# EAGLE board Console_Block-GiantPanel-v10 (EAGLE 6.6.0), part 1 of 13
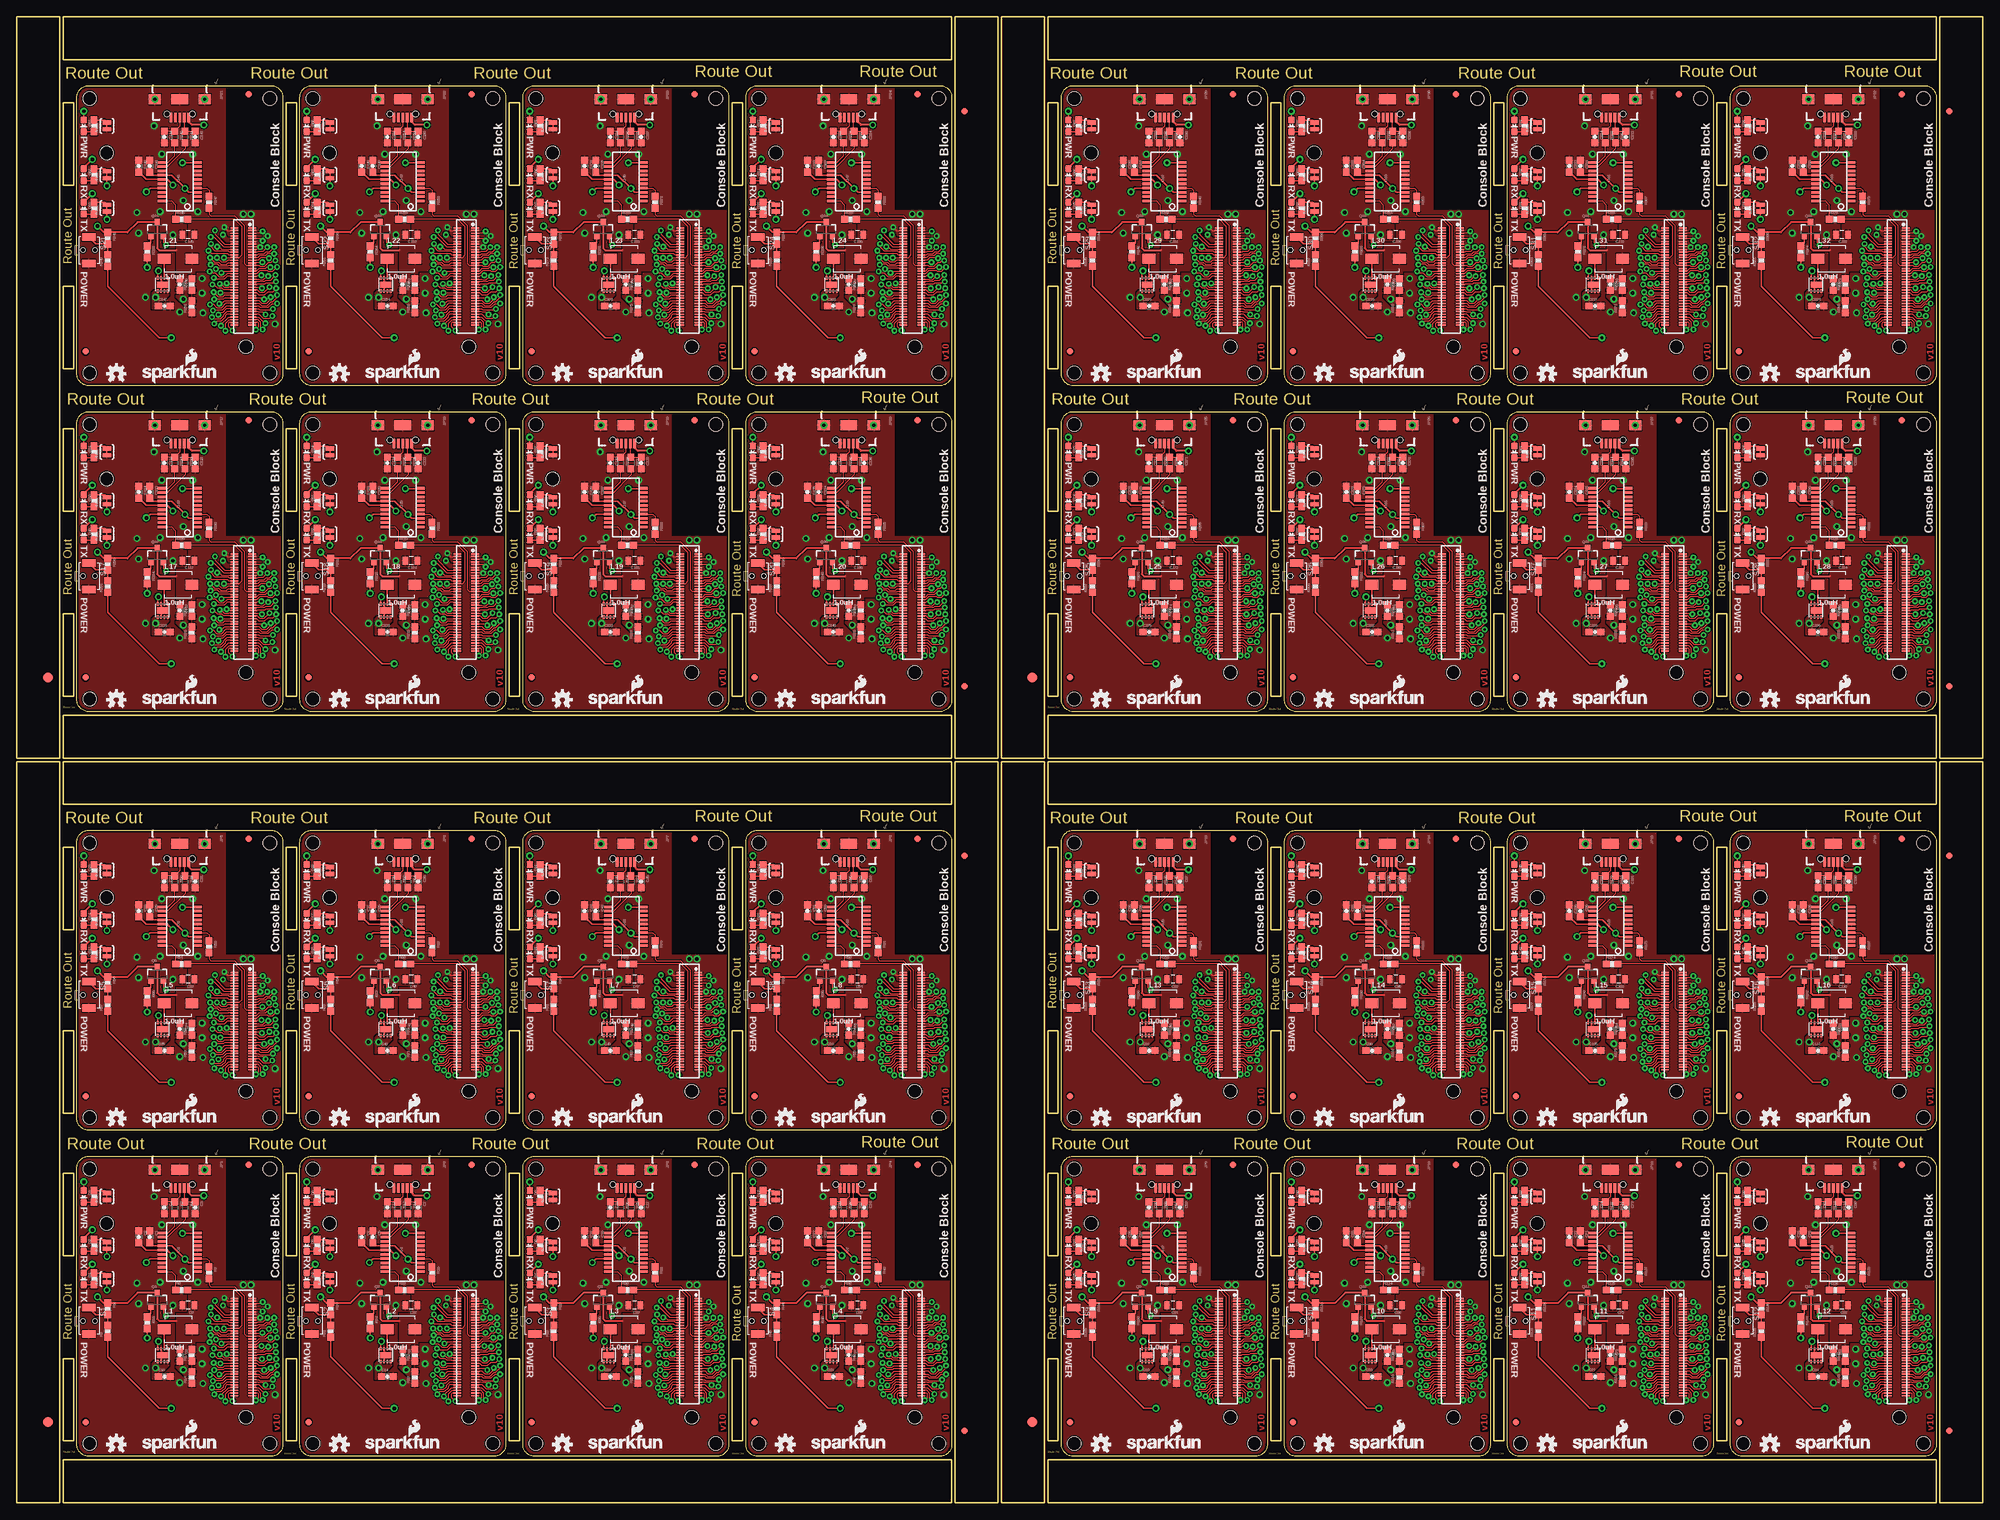
[diagram p0: board, top side]
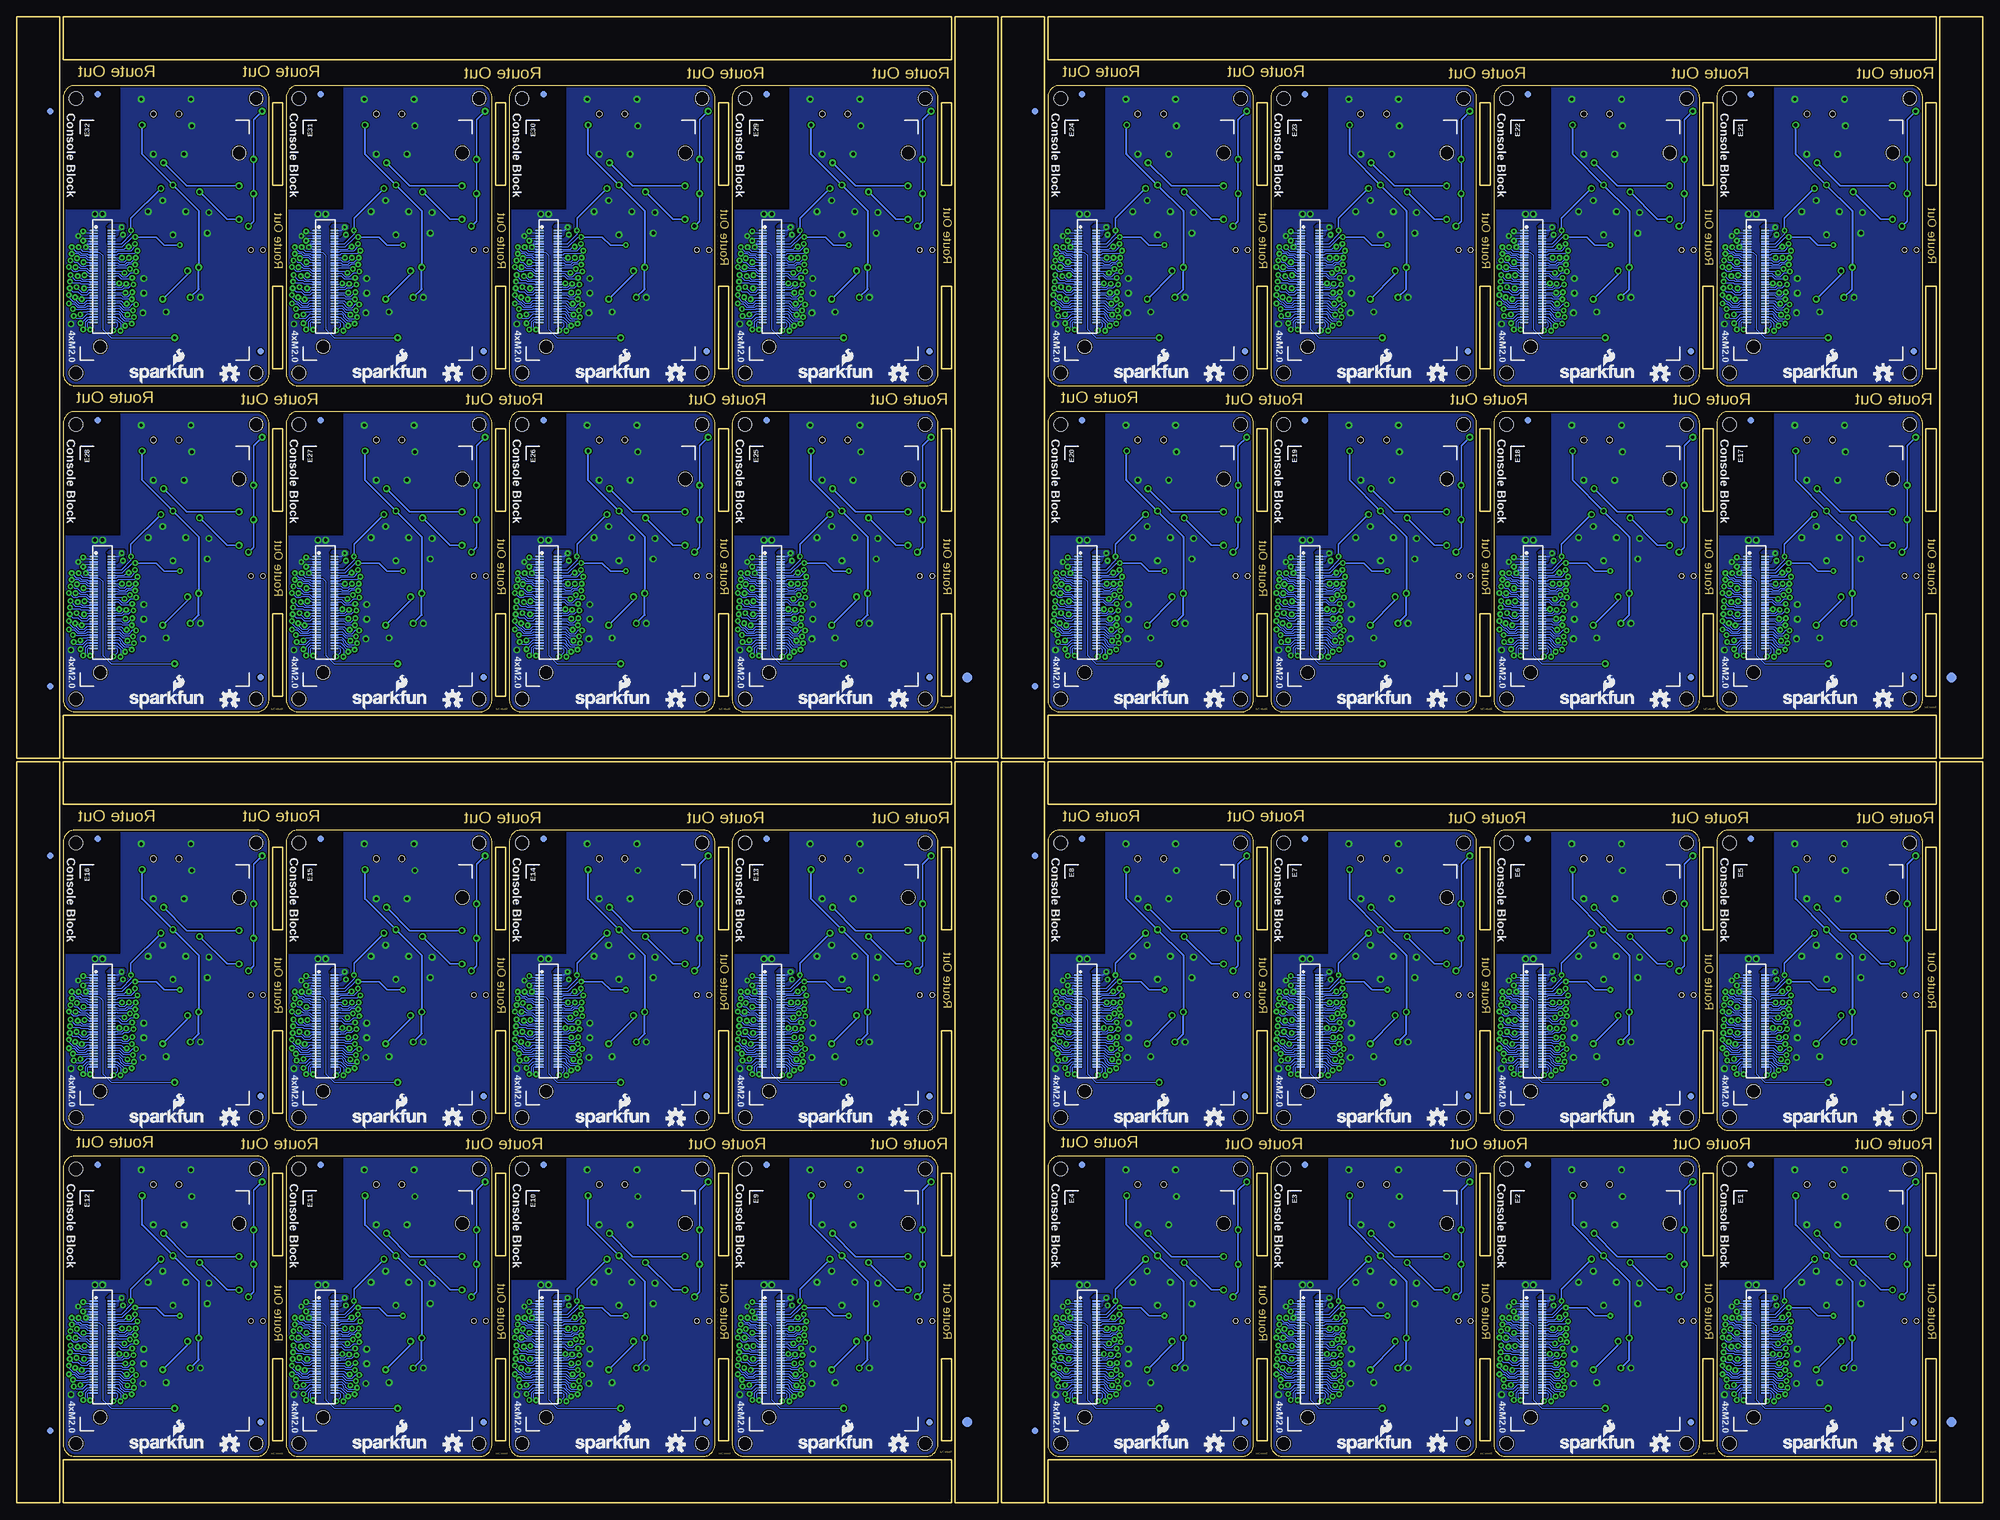
[diagram p1: board, bottom side, seen from below]

Size 291.08 x 219.96 mm. Coordinates in mm from the lower left corner, seen from the top.
Outline: 592 segments
Copper layers (1*16): Top 0.035mm / dielectric 1.5mm / Bottom 0.035mm
Design rules "SparkFun-2-layer *": minimum track width 6mil, minimum drill 13mil, track to track 6mil, track to pad 6mil, pad to pad 6mil, via to via 6mil, smd to smd 6mil, copper to edge 8mil, drill to drill 8mil, minimum pad ring 12mil, minimum via ring 10mil, stop-mask expansion 4mil, vias tented up to drill 20mil, thermal gap 6mil
Holes 2 mm at 37.47,8.76 10.79,8.76 10.79,49.4 37.47,49.4 70.48,8.76 43.81,8.76 43.81,49.4 70.48,49.4 103.5,8.76 76.83,8.76 76.83,49.4 103.5,49.4 136.53,8.76 109.86,8.76 109.86,49.4 136.53,49.4 37.47,57.02 10.79,57.02 10.79,97.66 37.47,97.66 70.48,57.02 43.81,57.02 43.81,97.66 70.48,97.66 103.5,57.02 76.83,57.02 76.83,97.66 103.5,97.66 136.53,57.02 109.86,57.02 109.86,97.66 136.53,97.66 183.26,8.76 156.59,8.76 156.59,49.4 183.26,49.4 216.28,8.76 189.61,8.76 189.61,49.4 216.28,49.4 249.3,8.76 222.63,8.76 222.63,49.4 249.3,49.4 282.32,8.76 255.65,8.76 255.65,49.4 282.32,49.4 183.26,57.02 156.59,57.02 156.59,97.66 183.26,97.66 216.28,57.02 189.61,57.02 189.61,97.66 216.28,97.66 249.3,57.02 222.63,57.02 222.63,97.66 249.3,97.66 282.32,57.02 255.65,57.02 255.65,97.66 282.32,97.66 37.47,119 10.79,119 10.79,159.64 37.47,159.64 70.48,119 43.81,119 43.81,159.64 70.48,159.64 103.5,119 76.83,119 76.83,159.64 103.5,159.64 136.53,119 109.86,119 109.86,159.64 136.53,159.64 37.47,167.26 10.79,167.26 10.79,207.9 37.47,207.9 70.48,167.26 43.81,167.26 43.81,207.9 70.48,207.9 103.5,167.26 76.83,167.26 76.83,207.9 103.5,207.9 136.53,167.26 109.86,167.26 109.86,207.9 136.53,207.9 183.26,119 156.59,119 156.59,159.64 183.26,159.64 216.28,119 189.61,119 189.61,159.64 216.28,159.64 249.3,119 222.63,119 222.63,159.64 249.3,159.64 282.32,119 255.65,119 255.65,159.64 282.32,159.64 183.26,167.26 156.59,167.26 156.59,207.9 183.26,207.9 216.28,167.26 189.61,167.26 189.61,207.9 216.28,207.9 249.3,167.26 222.63,167.26 222.63,207.9 249.3,207.9 282.32,167.26 255.65,167.26 255.65,207.9 282.32,207.9
tRestrict: area 31,33 to 39.4,51.3; area 64,33 to 72.4,51.3; area 97,33 to 105.4,51.3; area 130,33 to 138.4,51.3; area 31,81.3 to 39.4,99.6; area 64,81.3 to 72.4,99.6; area 97,81.3 to 105.4,99.6; area 130,81.3 to 138.4,99.6; area 176.8,33 to 185.2,51.3; area 209.8,33 to 218.2,51.3; area 242.8,33 to 251.2,51.3; area 275.8,33 to 284.2,51.3; 20 more areas; 128 lines
bRestrict: area 31,33 to 39.4,51.3; area 64,33 to 72.4,51.3; area 97,33 to 105.4,51.3; area 130,33 to 138.4,51.3; area 31,81.3 to 39.4,99.6; area 64,81.3 to 72.4,99.6; area 97,81.3 to 105.4,99.6; area 130,81.3 to 138.4,99.6; area 176.8,33 to 185.2,51.3; area 209.8,33 to 218.2,51.3; area 242.8,33 to 251.2,51.3; area 275.8,33 to 284.2,51.3; 20 more areas; 64 lines

## Footprints (pad centres in the part's own frame; a part is rotated, then mirrored left to right if it is on the bottom)
0603-CAP = smd 1.1 x 1: 1 -0.85,0; 2 0.85,0
0805 = smd 0.8 x 1.2: 1 -0.9,0; 2 0.9,0
LED-0603 = smd 1 x 1: A 0,-0.877; C 0,0.877
EDISON_DAUGHTER = smd 1.14 x 0.2: 1 1.98,19.17; 2 4.62,19.17; 3 1.98,18.77; 4 4.62,18.77; 5 1.98,18.37; 6 4.62,18.37; 7 1.98,17.97; 8 4.62,17.97; 9 1.98,17.57; 10 4.62,17.57; 11 1.98,17.17; 12 4.62,17.17; 13 1.98,16.77; 14 4.62,16.77; 15 1.98,16.37; 16 4.62,16.37; 17 1.98,15.97; 18 4.62,15.97; 19 1.98,15.57; 20 4.62,15.57; 21 1.98,15.17; 22 4.62,15.17; 23 1.98,14.77; 24 4.62,14.77; 25 1.98,14.37; 26 4.62,14.37; 27 1.98,13.97; 28 4.62,13.97; 29 1.98,13.57; 30 4.62,13.57; 31 1.98,13.17; 32 4.62,13.17; 33 1.98,12.77; 34 4.62,12.77; 35 1.98,12.37; 36 4.62,12.37; 37 1.98,11.97; 38 4.62,11.97; 39 1.98,11.57; 40 4.62,11.57; 41 1.98,11.17; 42 4.62,11.17; 43 1.98,10.77; 44 4.62,10.77; 45 1.98,10.37; 46 4.62,10.37; 47 1.98,9.97; 48 4.62,9.97; 49 1.98,9.57; 50 4.62,9.57; 51 1.98,9.17; 52 4.62,9.17; 53 1.98,8.77; 54 4.62,8.77; 55 1.98,8.37; 56 4.62,8.37; 57 1.98,7.97; 58 4.62,7.97; 59 1.98,7.57; 60 4.62,7.57; 61 1.98,7.17; 62 4.62,7.17; 63 1.98,6.77; 64 4.62,6.77; 65 1.98,6.37; 66 4.62,6.37; 67 1.98,5.97; 68 4.62,5.97; 69 1.98,5.57; 70 4.62,5.57 | hole 2: 23.53,30.67; 2.93,1.98
FIDUCIAL-1.5X3 = smd 1.5 x 1.5: 1 0,0
FIDUCIAL-1X2 = smd 1 x 1: 1 0,0
USB-B-MICRO-SMD_V03 = smd 1.4 x 0.4: D+1 2.7,0; D-1 2.7,0.65; GND1 2.7,-1.3; ID1 2.7,-0.65; VBUS1 2.7,1.3 | smd 1.5 x 1.8: SHIELD1 0,3.7; SHIELD2 0,-3.7 | smd 1.5 x 2.5: SHIELD3 0,0 | hole 0.85: 2.2,1.9; 2.2,-1.9
INDUCTOR-SRP4020 = smd 1.9 x 1.5: P$1 -2.05,0; P$2 2.05,0
SOT23-3 = smd 0.8 x 0.9: 1 -0.95,-1; 2 0.95,-1; 3 0,1.1
0603 = smd 1.1 x 1: 1 -0.85,0; 2 0.85,0
0603-RES = smd 1.1 x 1: 1 -0.85,0; 2 0.85,0
TACTILE_SWITCH-SMD-RIGHT-ANGLE = smd 1.1 x 2: 1 -1.95,0; 2 1.95,0 | hole 0.7: 0,0.9; 0,-0.9
PAD-JUMPER-2-NC_BY_TRACE_YES_SILK = smd 0.635 x 1.27: 1 -0.508,0; 2 0.508,0
SSOP20_L = smd 0.381 x 1.143: 1 -2.857,-2.68; 2 -2.223,-2.68; 3 -1.587,-2.68; 4 -0.953,-2.68; 5 -0.318,-2.68; 6 0.318,-2.68; 7 0.953,-2.68; 8 1.587,-2.68; 9 2.223,-2.68; 10 2.857,-2.68; 11 2.857,2.68; 12 2.223,2.68; 13 1.587,2.68; 14 0.953,2.68; 15 0.318,2.68; 16 -0.318,2.68; 17 -0.953,2.68; 18 -1.587,2.68; 19 -2.223,2.68; 20 -2.857,2.68
WSON-8-PAD = smd 0.25 x 0.5: 1 -0.75,-0.95; 2 -0.25,-0.95; 3 0.25,-0.95; 4 0.75,-0.95; 5 0.75,0.95; 6 0.25,0.95; 7 -0.25,0.95; 8 -0.75,0.95 | smd 1.6 x 0.9: PAD 0,0
DF40C-70DP-0.4(51) = smd 0.2 x 1.14 bottom: 1 6.8,1.32; 2 6.8,-1.32; 3 6.4,1.32; 4 6.4,-1.32; 5 6,1.32; 6 6,-1.32; 7 5.6,1.32; 8 5.6,-1.32; 9 5.2,1.32; 10 5.2,-1.32; 11 4.8,1.32; 12 4.8,-1.32; 13 4.4,1.32; 14 4.4,-1.32; 15 4,1.32; 16 4,-1.32; 17 3.6,1.32; 18 3.6,-1.32; 19 3.2,1.32; 20 3.2,-1.32; 21 2.8,1.32; 22 2.8,-1.32; 23 2.4,1.32; 24 2.4,-1.32; 25 2,1.32; 26 2,-1.32; 27 1.6,1.32; 28 1.6,-1.32; 29 1.2,1.32; 30 1.2,-1.32; 31 0.8,1.32; 32 0.8,-1.32; 33 0.4,1.32; 34 0.4,-1.32; 35 0,1.32; 36 0,-1.32; 37 -0.4,1.32; 38 -0.4,-1.32; 39 -0.8,1.32; 40 -0.8,-1.32; 41 -1.2,1.32; 42 -1.2,-1.32; 43 -1.6,1.32; 44 -1.6,-1.32; 45 -2,1.32; 46 -2,-1.32; 47 -2.4,1.32; 48 -2.4,-1.32; 49 -2.8,1.32; 50 -2.8,-1.32; 51 -3.2,1.32; 52 -3.2,-1.32; 53 -3.6,1.32; 54 -3.6,-1.32; 55 -4,1.32; 56 -4,-1.32; 57 -4.4,1.32; 58 -4.4,-1.32; 59 -4.8,1.32; 60 -4.8,-1.32; 61 -5.2,1.32; 62 -5.2,-1.32; 63 -5.6,1.32; 64 -5.6,-1.32; 65 -6,1.32; 66 -6,-1.32; 67 -6.4,1.32; 68 -6.4,-1.32; 69 -6.8,1.32; 70 -6.8,-1.32; NC1 7.2,1.32; NC2 7.2,-1.32; NC3 -7.2,-1.32; NC4 -7.2,1.32

## Placement (x,y rotation side)
C1  0.1uF  [0603-CAP]  19.68,39.37 270 top
C2  0.1uF  [0603-CAP]  18.03,39.37 270 top
C3  47pF  [0603-CAP]  26.42,43.69 270 top
C4  47pF  [0603-CAP]  21.84,43.69 270 top
C5  0.1uF  [0603-CAP]  52.7,39.37 270 top
C6  0.1uF  [0603-CAP]  51.05,39.37 270 top
C7  47pF  [0603-CAP]  59.44,43.69 270 top
C8  22uF  [0805]  25.4,29.21 180 top
C9  47pF  [0603-CAP]  24.13,21.84 270 top
C10  4.7uF  [0603-CAP]  21.84,18.67 0 top
C11  47pF  [0603-CAP]  54.86,43.69 270 top
C12  22uF  [0805]  58.42,29.21 180 top
C13  47pF  [0603-CAP]  57.15,21.84 270 top
C14  4.7uF  [0603-CAP]  54.86,18.67 0 top
C15  0.1uF  [0603-CAP]  85.72,39.37 270 top
C16  0.1uF  [0603-CAP]  84.07,39.37 270 top
C17  47pF  [0603-CAP]  92.46,43.69 270 top
C18  47pF  [0603-CAP]  87.88,43.69 270 top
C19  22uF  [0805]  91.44,29.21 180 top
C20  47pF  [0603-CAP]  90.17,21.84 270 top
C21  4.7uF  [0603-CAP]  87.88,18.67 0 top
C22  0.1uF  [0603-CAP]  118.75,39.37 270 top
C23  0.1uF  [0603-CAP]  117.09,39.37 270 top
C24  47pF  [0603-CAP]  125.48,43.69 270 top
C25  47pF  [0603-CAP]  120.9,43.69 270 top
C26  22uF  [0805]  124.46,29.21 180 top
C27  47pF  [0603-CAP]  123.19,21.84 270 top
C28  4.7uF  [0603-CAP]  120.9,18.67 0 top
C29  0.1uF  [0603-CAP]  19.68,87.63 270 top
C30  0.1uF  [0603-CAP]  18.03,87.63 270 top
C31  47pF  [0603-CAP]  26.42,91.95 270 top
C32  47pF  [0603-CAP]  21.84,91.95 270 top
C33  22uF  [0805]  25.4,77.47 180 top
C34  47pF  [0603-CAP]  24.13,70.1 270 top
C35  4.7uF  [0603-CAP]  21.84,66.93 0 top
C36  0.1uF  [0603-CAP]  52.7,87.63 270 top
C37  0.1uF  [0603-CAP]  51.05,87.63 270 top
C38  47pF  [0603-CAP]  59.44,91.95 270 top
C39  47pF  [0603-CAP]  54.86,91.95 270 top
C40  22uF  [0805]  58.42,77.47 180 top
C41  47pF  [0603-CAP]  57.15,70.1 270 top
C42  4.7uF  [0603-CAP]  54.86,66.93 0 top
C43  0.1uF  [0603-CAP]  85.72,87.63 270 top
C44  0.1uF  [0603-CAP]  84.07,87.63 270 top
C45  47pF  [0603-CAP]  92.46,91.95 270 top
C46  47pF  [0603-CAP]  87.88,91.95 270 top
C47  22uF  [0805]  91.44,77.47 180 top
C48  47pF  [0603-CAP]  90.17,70.1 270 top
C49  4.7uF  [0603-CAP]  87.88,66.93 0 top
C50  0.1uF  [0603-CAP]  118.75,87.63 270 top
C51  0.1uF  [0603-CAP]  117.09,87.63 270 top
C52  47pF  [0603-CAP]  125.48,91.95 270 top
C53  47pF  [0603-CAP]  120.9,91.95 270 top
C54  22uF  [0805]  124.46,77.47 180 top
C55  47pF  [0603-CAP]  123.19,70.1 270 top
C56  4.7uF  [0603-CAP]  120.9,66.93 0 top
C57  0.1uF  [0603-CAP]  165.48,39.37 270 top
C58  0.1uF  [0603-CAP]  163.83,39.37 270 top
C59  47pF  [0603-CAP]  172.21,43.69 270 top
C60  47pF  [0603-CAP]  167.64,43.69 270 top
C61  22uF  [0805]  171.2,29.21 180 top
C62  47pF  [0603-CAP]  169.93,21.84 270 top
C63  4.7uF  [0603-CAP]  167.64,18.67 0 top
C64  0.1uF  [0603-CAP]  198.5,39.37 270 top
C65  0.1uF  [0603-CAP]  196.85,39.37 270 top
C66  47pF  [0603-CAP]  205.23,43.69 270 top
C67  47pF  [0603-CAP]  200.66,43.69 270 top
C68  22uF  [0805]  204.22,29.21 180 top
C69  47pF  [0603-CAP]  202.95,21.84 270 top
C70  4.7uF  [0603-CAP]  200.66,18.67 0 top
C71  0.1uF  [0603-CAP]  231.52,39.37 270 top
C72  0.1uF  [0603-CAP]  229.87,39.37 270 top
C73  47pF  [0603-CAP]  238.25,43.69 270 top
C74  47pF  [0603-CAP]  233.68,43.69 270 top
C75  22uF  [0805]  237.24,29.21 180 top
C76  47pF  [0603-CAP]  235.97,21.84 270 top
C77  4.7uF  [0603-CAP]  233.68,18.67 0 top
C78  0.1uF  [0603-CAP]  264.54,39.37 270 top
C79  0.1uF  [0603-CAP]  262.89,39.37 270 top
C80  47pF  [0603-CAP]  271.27,43.69 270 top
C81  47pF  [0603-CAP]  266.7,43.69 270 top
C82  22uF  [0805]  270.26,29.21 180 top
C83  47pF  [0603-CAP]  268.99,21.84 270 top
C84  4.7uF  [0603-CAP]  266.7,18.67 0 top
C85  0.1uF  [0603-CAP]  165.48,87.63 270 top
C86  0.1uF  [0603-CAP]  163.83,87.63 270 top
C87  47pF  [0603-CAP]  172.21,91.95 270 top
C88  47pF  [0603-CAP]  167.64,91.95 270 top
C89  22uF  [0805]  171.2,77.47 180 top
C90  47pF  [0603-CAP]  169.93,70.1 270 top
C91  4.7uF  [0603-CAP]  167.64,66.93 0 top
C92  0.1uF  [0603-CAP]  198.5,87.63 270 top
C93  0.1uF  [0603-CAP]  196.85,87.63 270 top
C94  47pF  [0603-CAP]  205.23,91.95 270 top
C95  47pF  [0603-CAP]  200.66,91.95 270 top
C96  22uF  [0805]  204.22,77.47 180 top
C97  47pF  [0603-CAP]  202.95,70.1 270 top
C98  4.7uF  [0603-CAP]  200.66,66.93 0 top
C99  0.1uF  [0603-CAP]  231.52,87.63 270 top
C100  0.1uF  [0603-CAP]  229.87,87.63 270 top
C101  47pF  [0603-CAP]  238.25,91.95 270 top
C102  47pF  [0603-CAP]  233.68,91.95 270 top
C103  22uF  [0805]  237.24,77.47 180 top
C104  47pF  [0603-CAP]  235.97,70.1 270 top
C105  4.7uF  [0603-CAP]  233.68,66.93 0 top
C106  0.1uF  [0603-CAP]  264.54,87.63 270 top
C107  0.1uF  [0603-CAP]  262.89,87.63 270 top
C108  47pF  [0603-CAP]  271.27,91.95 270 top
C109  47pF  [0603-CAP]  266.7,91.95 270 top
C110  22uF  [0805]  270.26,77.47 180 top
C111  47pF  [0603-CAP]  268.99,70.1 270 top
C112  4.7uF  [0603-CAP]  266.7,66.93 0 top
C113  0.1uF  [0603-CAP]  19.68,149.61 270 top
C114  0.1uF  [0603-CAP]  18.03,149.61 270 top
C115  47pF  [0603-CAP]  26.42,153.92 270 top
C116  47pF  [0603-CAP]  21.84,153.92 270 top
C117  22uF  [0805]  25.4,139.45 180 top
C118  47pF  [0603-CAP]  24.13,132.08 270 top
C119  4.7uF  [0603-CAP]  21.84,128.91 0 top
C120  0.1uF  [0603-CAP]  52.7,149.61 270 top
C121  0.1uF  [0603-CAP]  51.05,149.61 270 top
C122  47pF  [0603-CAP]  59.44,153.92 270 top
C123  47pF  [0603-CAP]  54.86,153.92 270 top
C124  22uF  [0805]  58.42,139.45 180 top
C125  47pF  [0603-CAP]  57.15,132.08 270 top
C126  4.7uF  [0603-CAP]  54.86,128.91 0 top
C127  0.1uF  [0603-CAP]  85.72,149.61 270 top
C128  0.1uF  [0603-CAP]  84.07,149.61 270 top
C129  47pF  [0603-CAP]  92.46,153.92 270 top
C130  47pF  [0603-CAP]  87.88,153.92 270 top
C131  22uF  [0805]  91.44,139.45 180 top
C132  47pF  [0603-CAP]  90.17,132.08 270 top
C133  4.7uF  [0603-CAP]  87.88,128.91 0 top
C134  0.1uF  [0603-CAP]  118.75,149.61 270 top
C135  0.1uF  [0603-CAP]  117.09,149.61 270 top
C136  47pF  [0603-CAP]  125.48,153.92 270 top
C137  47pF  [0603-CAP]  120.9,153.92 270 top
C138  22uF  [0805]  124.46,139.45 180 top
C139  47pF  [0603-CAP]  123.19,132.08 270 top
C140  4.7uF  [0603-CAP]  120.9,128.91 0 top
C141  0.1uF  [0603-CAP]  19.68,197.87 270 top
C142  0.1uF  [0603-CAP]  18.03,197.87 270 top
C143  47pF  [0603-CAP]  26.42,202.18 270 top
C144  47pF  [0603-CAP]  21.84,202.18 270 top
C145  22uF  [0805]  25.4,187.71 180 top
C146  47pF  [0603-CAP]  24.13,180.34 270 top
C147  4.7uF  [0603-CAP]  21.84,177.16 0 top
C148  0.1uF  [0603-CAP]  52.7,197.87 270 top
C149  0.1uF  [0603-CAP]  51.05,197.87 270 top
C150  47pF  [0603-CAP]  59.44,202.18 270 top
C151  47pF  [0603-CAP]  54.86,202.18 270 top
C152  22uF  [0805]  58.42,187.71 180 top
C153  47pF  [0603-CAP]  57.15,180.34 270 top
C154  4.7uF  [0603-CAP]  54.86,177.16 0 top
C155  0.1uF  [0603-CAP]  85.72,197.87 270 top
C156  0.1uF  [0603-CAP]  84.07,197.87 270 top
C157  47pF  [0603-CAP]  92.46,202.18 270 top
C158  47pF  [0603-CAP]  87.88,202.18 270 top
C159  22uF  [0805]  91.44,187.71 180 top
C160  47pF  [0603-CAP]  90.17,180.34 270 top
C161  4.7uF  [0603-CAP]  87.88,177.16 0 top
C162  0.1uF  [0603-CAP]  118.75,197.87 270 top
C163  0.1uF  [0603-CAP]  117.09,197.87 270 top
C164  47pF  [0603-CAP]  125.48,202.18 270 top
C165  47pF  [0603-CAP]  120.9,202.18 270 top
C166  22uF  [0805]  124.46,187.71 180 top
C167  47pF  [0603-CAP]  123.19,180.34 270 top
C168  4.7uF  [0603-CAP]  120.9,177.16 0 top
C169  0.1uF  [0603-CAP]  165.48,149.61 270 top
C170  0.1uF  [0603-CAP]  163.83,149.61 270 top
C171  47pF  [0603-CAP]  172.21,153.92 270 top
C172  47pF  [0603-CAP]  167.64,153.92 270 top
C173  22uF  [0805]  171.2,139.45 180 top
C174  47pF  [0603-CAP]  169.93,132.08 270 top
C175  4.7uF  [0603-CAP]  167.64,128.91 0 top
C176  0.1uF  [0603-CAP]  198.5,149.61 270 top
C177  0.1uF  [0603-CAP]  196.85,149.61 270 top
C178  47pF  [0603-CAP]  205.23,153.92 270 top
C179  47pF  [0603-CAP]  200.66,153.92 270 top
C180  22uF  [0805]  204.22,139.45 180 top
C181  47pF  [0603-CAP]  202.95,132.08 270 top
C182  4.7uF  [0603-CAP]  200.66,128.91 0 top
C183  0.1uF  [0603-CAP]  231.52,149.61 270 top
C184  0.1uF  [0603-CAP]  229.87,149.61 270 top
C185  47pF  [0603-CAP]  238.25,153.92 270 top
C186  47pF  [0603-CAP]  233.68,153.92 270 top
C187  22uF  [0805]  237.24,139.45 180 top
C188  47pF  [0603-CAP]  235.97,132.08 270 top
C189  4.7uF  [0603-CAP]  233.68,128.91 0 top
C190  0.1uF  [0603-CAP]  264.54,149.61 270 top
C191  0.1uF  [0603-CAP]  262.89,149.61 270 top
C192  47pF  [0603-CAP]  271.27,153.92 270 top
C193  47pF  [0603-CAP]  266.7,153.92 270 top
C194  22uF  [0805]  270.26,139.45 180 top
C195  47pF  [0603-CAP]  268.99,132.08 270 top
C196  4.7uF  [0603-CAP]  266.7,128.91 0 top
C197  0.1uF  [0603-CAP]  165.48,197.87 270 top
C198  0.1uF  [0603-CAP]  163.83,197.87 270 top
C199  47pF  [0603-CAP]  172.21,202.18 270 top
C200  47pF  [0603-CAP]  167.64,202.18 270 top
C201  22uF  [0805]  171.2,187.71 180 top
C202  47pF  [0603-CAP]  169.93,180.34 270 top
C203  4.7uF  [0603-CAP]  167.64,177.16 0 top
C204  0.1uF  [0603-CAP]  198.5,197.87 270 top
C205  0.1uF  [0603-CAP]  196.85,197.87 270 top
C206  47pF  [0603-CAP]  205.23,202.18 270 top
C207  47pF  [0603-CAP]  200.66,202.18 270 top
C208  22uF  [0805]  204.22,187.71 180 top
C209  47pF  [0603-CAP]  202.95,180.34 270 top
C210  4.7uF  [0603-CAP]  200.66,177.16 0 top
C211  0.1uF  [0603-CAP]  231.52,197.87 270 top
C212  0.1uF  [0603-CAP]  229.87,197.87 270 top
C213  47pF  [0603-CAP]  238.25,202.18 270 top
C214  47pF  [0603-CAP]  233.68,202.18 270 top
C215  22uF  [0805]  237.24,187.71 180 top
C216  47pF  [0603-CAP]  235.97,180.34 270 top
C217  4.7uF  [0603-CAP]  233.68,177.16 0 top
C218  0.1uF  [0603-CAP]  264.54,197.87 270 top
C219  0.1uF  [0603-CAP]  262.89,197.87 270 top
C220  47pF  [0603-CAP]  271.27,202.18 270 top
C221  47pF  [0603-CAP]  266.7,202.18 270 top
C222  22uF  [0805]  270.26,187.71 180 top
C223  47pF  [0603-CAP]  268.99,180.34 270 top
C224  4.7uF  [0603-CAP]  266.7,177.16 0 top
D1  RED  [LED-0603]  9.91,33.15 180 top
D2  YELLOW  [LED-0603]  9.91,38.1 180 top
D3  BLUE  [LED-0603]  9.91,45.34 180 top
D4  RED  [LED-0603]  42.93,33.15 180 top
D5  YELLOW  [LED-0603]  42.93,38.1 180 top
D6  BLUE  [LED-0603]  42.93,45.34 180 top
D7  RED  [LED-0603]  75.95,33.15 180 top
D8  YELLOW  [LED-0603]  75.95,38.1 180 top
D9  BLUE  [LED-0603]  75.95,45.34 180 top
D10  RED  [LED-0603]  108.97,33.15 180 top
D11  YELLOW  [LED-0603]  108.97,38.1 180 top
D12  BLUE  [LED-0603]  108.97,45.34 180 top
D13  RED  [LED-0603]  9.91,81.41 180 top
D14  YELLOW  [LED-0603]  9.91,86.36 180 top
D15  BLUE  [LED-0603]  9.91,93.6 180 top
D16  RED  [LED-0603]  42.93,81.41 180 top
D17  YELLOW  [LED-0603]  42.93,86.36 180 top
D18  BLUE  [LED-0603]  42.93,93.6 180 top
D19  RED  [LED-0603]  75.95,81.41 180 top
D20  YELLOW  [LED-0603]  75.95,86.36 180 top
D21  BLUE  [LED-0603]  75.95,93.6 180 top
D22  RED  [LED-0603]  108.97,81.41 180 top
D23  YELLOW  [LED-0603]  108.97,86.36 180 top
D24  BLUE  [LED-0603]  108.97,93.6 180 top
D25  RED  [LED-0603]  155.7,33.15 180 top
D26  YELLOW  [LED-0603]  155.7,38.1 180 top
D27  BLUE  [LED-0603]  155.7,45.34 180 top
D28  RED  [LED-0603]  188.72,33.15 180 top
D29  YELLOW  [LED-0603]  188.72,38.1 180 top
D30  BLUE  [LED-0603]  188.72,45.34 180 top
D31  RED  [LED-0603]  221.74,33.15 180 top
D32  YELLOW  [LED-0603]  221.74,38.1 180 top
D33  BLUE  [LED-0603]  221.74,45.34 180 top
D34  RED  [LED-0603]  254.76,33.15 180 top
D35  YELLOW  [LED-0603]  254.76,38.1 180 top
D36  BLUE  [LED-0603]  254.76,45.34 180 top
D37  RED  [LED-0603]  155.7,81.41 180 top
D38  YELLOW  [LED-0603]  155.7,86.36 180 top
D39  BLUE  [LED-0603]  155.7,93.6 180 top
D40  RED  [LED-0603]  188.72,81.41 180 top
D41  YELLOW  [LED-0603]  188.72,86.36 180 top
D42  BLUE  [LED-0603]  188.72,93.6 180 top
D43  RED  [LED-0603]  221.74,81.41 180 top
D44  YELLOW  [LED-0603]  221.74,86.36 180 top
D45  BLUE  [LED-0603]  221.74,93.6 180 top
D46  RED  [LED-0603]  254.76,81.41 180 top
D47  YELLOW  [LED-0603]  254.76,86.36 180 top
D48  BLUE  [LED-0603]  254.76,93.6 180 top
D49  RED  [LED-0603]  9.91,143.38 180 top
D50  YELLOW  [LED-0603]  9.91,148.34 180 top
D51  BLUE  [LED-0603]  9.91,155.57 180 top
D52  RED  [LED-0603]  42.93,143.38 180 top
D53  YELLOW  [LED-0603]  42.93,148.34 180 top
D54  BLUE  [LED-0603]  42.93,155.57 180 top
D55  RED  [LED-0603]  75.95,143.38 180 top
D56  YELLOW  [LED-0603]  75.95,148.34 180 top
D57  BLUE  [LED-0603]  75.95,155.57 180 top
D58  RED  [LED-0603]  108.97,143.38 180 top
D59  YELLOW  [LED-0603]  108.97,148.34 180 top
D60  BLUE  [LED-0603]  108.97,155.57 180 top
D61  RED  [LED-0603]  9.91,191.64 180 top
D62  YELLOW  [LED-0603]  9.91,196.6 180 top
D63  BLUE  [LED-0603]  9.91,203.84 180 top
D64  RED  [LED-0603]  42.93,191.64 180 top
D65  YELLOW  [LED-0603]  42.93,196.6 180 top
D66  BLUE  [LED-0603]  42.93,203.84 180 top
D67  RED  [LED-0603]  75.95,191.64 180 top
D68  YELLOW  [LED-0603]  75.95,196.6 180 top
D69  BLUE  [LED-0603]  75.95,203.84 180 top
D70  RED  [LED-0603]  108.97,191.64 180 top
D71  YELLOW  [LED-0603]  108.97,196.6 180 top
D72  BLUE  [LED-0603]  108.97,203.84 180 top
D73  RED  [LED-0603]  155.7,143.38 180 top
D74  YELLOW  [LED-0603]  155.7,148.34 180 top
D75  BLUE  [LED-0603]  155.7,155.57 180 top
D76  RED  [LED-0603]  188.72,143.38 180 top
D77  YELLOW  [LED-0603]  188.72,148.34 180 top
D78  BLUE  [LED-0603]  188.72,155.57 180 top
D79  RED  [LED-0603]  221.74,143.38 180 top
D80  YELLOW  [LED-0603]  221.74,148.34 180 top
D81  BLUE  [LED-0603]  221.74,155.57 180 top
D82  RED  [LED-0603]  254.76,143.38 180 top
D83  YELLOW  [LED-0603]  254.76,148.34 180 top
D84  BLUE  [LED-0603]  254.76,155.57 180 top
D85  RED  [LED-0603]  155.7,191.64 180 top
D86  YELLOW  [LED-0603]  155.7,196.6 180 top
D87  BLUE  [LED-0603]  155.7,203.84 180 top
D88  RED  [LED-0603]  188.72,191.64 180 top
D89  YELLOW  [LED-0603]  188.72,196.6 180 top
D90  BLUE  [LED-0603]  188.72,203.84 180 top
D91  RED  [LED-0603]  221.74,191.64 180 top
D92  YELLOW  [LED-0603]  221.74,196.6 180 top
D93  BLUE  [LED-0603]  221.74,203.84 180 top
D94  RED  [LED-0603]  254.76,191.64 180 top
D95  YELLOW  [LED-0603]  254.76,196.6 180 top
D96  BLUE  [LED-0603]  254.76,203.84 180 top
E1  EDISON_CONNECTOR_FULLMOUNTING_HOLES  [EDISON_DAUGHTER]  36.83,10.67 0 bottom
E2  EDISON_CONNECTOR_FULLMOUNTING_HOLES  [EDISON_DAUGHTER]  69.85,10.67 0 bottom
E3  EDISON_CONNECTOR_FULLMOUNTING_HOLES  [EDISON_DAUGHTER]  102.87,10.67 0 bottom
E4  EDISON_CONNECTOR_FULLMOUNTING_HOLES  [EDISON_DAUGHTER]  135.89,10.67 0 bottom
E5  EDISON_CONNECTOR_FULLMOUNTING_HOLES  [EDISON_DAUGHTER]  36.83,58.93 0 bottom
E6  EDISON_CONNECTOR_FULLMOUNTING_HOLES  [EDISON_DAUGHTER]  69.85,58.93 0 bottom
E7  EDISON_CONNECTOR_FULLMOUNTING_HOLES  [EDISON_DAUGHTER]  102.87,58.93 0 bottom
E8  EDISON_CONNECTOR_FULLMOUNTING_HOLES  [EDISON_DAUGHTER]  135.89,58.93 0 bottom
E9  EDISON_CONNECTOR_FULLMOUNTING_HOLES  [EDISON_DAUGHTER]  182.63,10.67 0 bottom
E10  EDISON_CONNECTOR_FULLMOUNTING_HOLES  [EDISON_DAUGHTER]  215.65,10.67 0 bottom
E11  EDISON_CONNECTOR_FULLMOUNTING_HOLES  [EDISON_DAUGHTER]  248.67,10.67 0 bottom
E12  EDISON_CONNECTOR_FULLMOUNTING_HOLES  [EDISON_DAUGHTER]  281.69,10.67 0 bottom
E13  EDISON_CONNECTOR_FULLMOUNTING_HOLES  [EDISON_DAUGHTER]  182.63,58.93 0 bottom
E14  EDISON_CONNECTOR_FULLMOUNTING_HOLES  [EDISON_DAUGHTER]  215.65,58.93 0 bottom
E15  EDISON_CONNECTOR_FULLMOUNTING_HOLES  [EDISON_DAUGHTER]  248.67,58.93 0 bottom
E16  EDISON_CONNECTOR_FULLMOUNTING_HOLES  [EDISON_DAUGHTER]  281.69,58.93 0 bottom
E17  EDISON_CONNECTOR_FULLMOUNTING_HOLES  [EDISON_DAUGHTER]  36.83,120.9 0 bottom
E18  EDISON_CONNECTOR_FULLMOUNTING_HOLES  [EDISON_DAUGHTER]  69.85,120.9 0 bottom
E19  EDISON_CONNECTOR_FULLMOUNTING_HOLES  [EDISON_DAUGHTER]  102.87,120.9 0 bottom
E20  EDISON_CONNECTOR_FULLMOUNTING_HOLES  [EDISON_DAUGHTER]  135.89,120.9 0 bottom
E21  EDISON_CONNECTOR_FULLMOUNTING_HOLES  [EDISON_DAUGHTER]  36.83,169.16 0 bottom
E22  EDISON_CONNECTOR_FULLMOUNTING_HOLES  [EDISON_DAUGHTER]  69.85,169.16 0 bottom
E23  EDISON_CONNECTOR_FULLMOUNTING_HOLES  [EDISON_DAUGHTER]  102.87,169.16 0 bottom
E24  EDISON_CONNECTOR_FULLMOUNTING_HOLES  [EDISON_DAUGHTER]  135.89,169.16 0 bottom
E25  EDISON_CONNECTOR_FULLMOUNTING_HOLES  [EDISON_DAUGHTER]  182.63,120.9 0 bottom
E26  EDISON_CONNECTOR_FULLMOUNTING_HOLES  [EDISON_DAUGHTER]  215.65,120.9 0 bottom
E27  EDISON_CONNECTOR_FULLMOUNTING_HOLES  [EDISON_DAUGHTER]  248.67,120.9 0 bottom
E28  EDISON_CONNECTOR_FULLMOUNTING_HOLES  [EDISON_DAUGHTER]  281.69,120.9 0 bottom
E29  EDISON_CONNECTOR_FULLMOUNTING_HOLES  [EDISON_DAUGHTER]  182.63,169.16 0 bottom
E30  EDISON_CONNECTOR_FULLMOUNTING_HOLES  [EDISON_DAUGHTER]  215.65,169.16 0 bottom
E31  EDISON_CONNECTOR_FULLMOUNTING_HOLES  [EDISON_DAUGHTER]  248.67,169.16 0 bottom
E32  EDISON_CONNECTOR_FULLMOUNTING_HOLES  [EDISON_DAUGHTER]  281.69,169.16 0 bottom
E$1  [FIDUCIAL-1.5X3]  4.57,11.94 0 top
E$2  [FIDUCIAL-1.5X3]  4.57,11.94 0 bottom
E$3  [FIDUCIAL-1X2]  140.34,10.67 0 bottom
E$4  [FIDUCIAL-1X2]  140.34,10.67 0 top
E$5  [FIDUCIAL-1X2]  140.34,95.76 180 top
E$6  [FIDUCIAL-1X2]  140.34,95.76 180 bottom
E$7  [FIDUCIAL-1X2]  286.13,10.67 0 top
E$8  [FIDUCIAL-1X2]  286.13,95.76 180 top
E$9  [FIDUCIAL-1.5X3]  150.37,11.94 0 top
E$10  [FIDUCIAL-1.5X3]  150.37,11.94 0 bottom
E$11  [FIDUCIAL-1X2]  286.13,10.67 0 bottom
E$12  [FIDUCIAL-1X2]  286.13,95.76 180 bottom
E$13  [FIDUCIAL-1X2]  140.34,120.9 0 top
E$14  [FIDUCIAL-1X2]  140.34,205.99 180 top
E$15  [FIDUCIAL-1.5X3]  4.57,122.17 0 top
E$16  [FIDUCIAL-1.5X3]  4.57,122.17 0 bottom
E$17  [FIDUCIAL-1X2]  140.34,120.9 0 bottom
E$18  [FIDUCIAL-1X2]  140.34,205.99 180 bottom
E$19  [FIDUCIAL-1X2]  286.13,120.9 0 top
E$20  [FIDUCIAL-1X2]  286.13,205.99 180 top
E$21  [FIDUCIAL-1.5X3]  150.37,122.17 0 top
E$22  [FIDUCIAL-1.5X3]  150.37,122.17 0 bottom
E$23  [FIDUCIAL-1X2]  286.13,120.9 0 bottom
E$24  [FIDUCIAL-1X2]  286.13,205.99 180 bottom
FID1  FIDUCIAL1X2  [FIDUCIAL-1X2]  10.16,11.94 0 top
FID2  FIDUCIAL1X2  [FIDUCIAL-1X2]  34.29,50.04 0 top
FID3  FIDUCIAL1X2  [FIDUCIAL-1X2]  10.16,11.94 0 bottom
FID4  FIDUCIAL1X2  [FIDUCIAL-1X2]  34.29,50.04 0 bottom
FID5  FIDUCIAL1X2  [FIDUCIAL-1X2]  43.18,11.94 0 top
FID6  FIDUCIAL1X2  [FIDUCIAL-1X2]  67.31,50.04 0 top
FID7  FIDUCIAL1X2  [FIDUCIAL-1X2]  43.18,11.94 0 bottom
FID8  FIDUCIAL1X2  [FIDUCIAL-1X2]  67.31,50.04 0 bottom
FID9  FIDUCIAL1X2  [FIDUCIAL-1X2]  76.2,11.94 0 top
FID10  FIDUCIAL1X2  [FIDUCIAL-1X2]  100.33,50.04 0 top
FID11  FIDUCIAL1X2  [FIDUCIAL-1X2]  76.2,11.94 0 bottom
FID12  FIDUCIAL1X2  [FIDUCIAL-1X2]  100.33,50.04 0 bottom
FID13  FIDUCIAL1X2  [FIDUCIAL-1X2]  109.22,11.94 0 top
FID14  FIDUCIAL1X2  [FIDUCIAL-1X2]  133.35,50.04 0 top
FID15  FIDUCIAL1X2  [FIDUCIAL-1X2]  109.22,11.94 0 bottom
FID16  FIDUCIAL1X2  [FIDUCIAL-1X2]  133.35,50.04 0 bottom
FID17  FIDUCIAL1X2  [FIDUCIAL-1X2]  10.16,60.2 0 top
FID18  FIDUCIAL1X2  [FIDUCIAL-1X2]  34.29,98.3 0 top
FID19  FIDUCIAL1X2  [FIDUCIAL-1X2]  10.16,60.2 0 bottom
FID20  FIDUCIAL1X2  [FIDUCIAL-1X2]  34.29,98.3 0 bottom
FID21  FIDUCIAL1X2  [FIDUCIAL-1X2]  43.18,60.2 0 top
FID22  FIDUCIAL1X2  [FIDUCIAL-1X2]  67.31,98.3 0 top
FID23  FIDUCIAL1X2  [FIDUCIAL-1X2]  43.18,60.2 0 bottom
FID24  FIDUCIAL1X2  [FIDUCIAL-1X2]  67.31,98.3 0 bottom
FID25  FIDUCIAL1X2  [FIDUCIAL-1X2]  76.2,60.2 0 top
FID26  FIDUCIAL1X2  [FIDUCIAL-1X2]  100.33,98.3 0 top
FID27  FIDUCIAL1X2  [FIDUCIAL-1X2]  76.2,60.2 0 bottom
FID28  FIDUCIAL1X2  [FIDUCIAL-1X2]  100.33,98.3 0 bottom
FID29  FIDUCIAL1X2  [FIDUCIAL-1X2]  109.22,60.2 0 top
FID30  FIDUCIAL1X2  [FIDUCIAL-1X2]  133.35,98.3 0 top
FID31  FIDUCIAL1X2  [FIDUCIAL-1X2]  109.22,60.2 0 bottom
FID32  FIDUCIAL1X2  [FIDUCIAL-1X2]  133.35,98.3 0 bottom
FID33  FIDUCIAL1X2  [FIDUCIAL-1X2]  155.96,11.94 0 top
FID34  FIDUCIAL1X2  [FIDUCIAL-1X2]  180.09,50.04 0 top
FID35  FIDUCIAL1X2  [FIDUCIAL-1X2]  155.96,11.94 0 bottom
FID36  FIDUCIAL1X2  [FIDUCIAL-1X2]  180.09,50.04 0 bottom
FID37  FIDUCIAL1X2  [FIDUCIAL-1X2]  188.98,11.94 0 top
FID38  FIDUCIAL1X2  [FIDUCIAL-1X2]  213.11,50.04 0 top
FID39  FIDUCIAL1X2  [FIDUCIAL-1X2]  188.98,11.94 0 bottom
FID40  FIDUCIAL1X2  [FIDUCIAL-1X2]  213.11,50.04 0 bottom
FID41  FIDUCIAL1X2  [FIDUCIAL-1X2]  222,11.94 0 top
FID42  FIDUCIAL1X2  [FIDUCIAL-1X2]  246.13,50.04 0 top
FID43  FIDUCIAL1X2  [FIDUCIAL-1X2]  222,11.94 0 bottom
FID44  FIDUCIAL1X2  [FIDUCIAL-1X2]  246.13,50.04 0 bottom
FID45  FIDUCIAL1X2  [FIDUCIAL-1X2]  255.02,11.94 0 top
FID46  FIDUCIAL1X2  [FIDUCIAL-1X2]  279.15,50.04 0 top
FID47  FIDUCIAL1X2  [FIDUCIAL-1X2]  255.02,11.94 0 bottom
FID48  FIDUCIAL1X2  [FIDUCIAL-1X2]  279.15,50.04 0 bottom
FID49  FIDUCIAL1X2  [FIDUCIAL-1X2]  155.96,60.2 0 top
FID50  FIDUCIAL1X2  [FIDUCIAL-1X2]  180.09,98.3 0 top
FID51  FIDUCIAL1X2  [FIDUCIAL-1X2]  155.96,60.2 0 bottom
FID52  FIDUCIAL1X2  [FIDUCIAL-1X2]  180.09,98.3 0 bottom
FID53  FIDUCIAL1X2  [FIDUCIAL-1X2]  188.98,60.2 0 top
FID54  FIDUCIAL1X2  [FIDUCIAL-1X2]  213.11,98.3 0 top
FID55  FIDUCIAL1X2  [FIDUCIAL-1X2]  188.98,60.2 0 bottom
FID56  FIDUCIAL1X2  [FIDUCIAL-1X2]  213.11,98.3 0 bottom
FID57  FIDUCIAL1X2  [FIDUCIAL-1X2]  222,60.2 0 top
FID58  FIDUCIAL1X2  [FIDUCIAL-1X2]  246.13,98.3 0 top
FID59  FIDUCIAL1X2  [FIDUCIAL-1X2]  222,60.2 0 bottom
FID60  FIDUCIAL1X2  [FIDUCIAL-1X2]  246.13,98.3 0 bottom
FID61  FIDUCIAL1X2  [FIDUCIAL-1X2]  255.02,60.2 0 top
FID62  FIDUCIAL1X2  [FIDUCIAL-1X2]  279.15,98.3 0 top
FID63  FIDUCIAL1X2  [FIDUCIAL-1X2]  255.02,60.2 0 bottom
FID64  FIDUCIAL1X2  [FIDUCIAL-1X2]  279.15,98.3 0 bottom
FID65  FIDUCIAL1X2  [FIDUCIAL-1X2]  10.16,122.17 0 top
FID66  FIDUCIAL1X2  [FIDUCIAL-1X2]  34.29,160.27 0 top
FID67  FIDUCIAL1X2  [FIDUCIAL-1X2]  10.16,122.17 0 bottom
FID68  FIDUCIAL1X2  [FIDUCIAL-1X2]  34.29,160.27 0 bottom
FID69  FIDUCIAL1X2  [FIDUCIAL-1X2]  43.18,122.17 0 top
FID70  FIDUCIAL1X2  [FIDUCIAL-1X2]  67.31,160.27 0 top
FID71  FIDUCIAL1X2  [FIDUCIAL-1X2]  43.18,122.17 0 bottom
FID72  FIDUCIAL1X2  [FIDUCIAL-1X2]  67.31,160.27 0 bottom
FID73  FIDUCIAL1X2  [FIDUCIAL-1X2]  76.2,122.17 0 top
FID74  FIDUCIAL1X2  [FIDUCIAL-1X2]  100.33,160.27 0 top
FID75  FIDUCIAL1X2  [FIDUCIAL-1X2]  76.2,122.17 0 bottom
FID76  FIDUCIAL1X2  [FIDUCIAL-1X2]  100.33,160.27 0 bottom
FID77  FIDUCIAL1X2  [FIDUCIAL-1X2]  109.22,122.17 0 top
FID78  FIDUCIAL1X2  [FIDUCIAL-1X2]  133.35,160.27 0 top
FID79  FIDUCIAL1X2  [FIDUCIAL-1X2]  109.22,122.17 0 bottom
FID80  FIDUCIAL1X2  [FIDUCIAL-1X2]  133.35,160.27 0 bottom
FID81  FIDUCIAL1X2  [FIDUCIAL-1X2]  10.16,170.43 0 top
FID82  FIDUCIAL1X2  [FIDUCIAL-1X2]  34.29,208.53 0 top
FID83  FIDUCIAL1X2  [FIDUCIAL-1X2]  10.16,170.43 0 bottom
FID84  FIDUCIAL1X2  [FIDUCIAL-1X2]  34.29,208.53 0 bottom
FID85  FIDUCIAL1X2  [FIDUCIAL-1X2]  43.18,170.43 0 top
FID86  FIDUCIAL1X2  [FIDUCIAL-1X2]  67.31,208.53 0 top
FID87  FIDUCIAL1X2  [FIDUCIAL-1X2]  43.18,170.43 0 bottom
FID88  FIDUCIAL1X2  [FIDUCIAL-1X2]  67.31,208.53 0 bottom
FID89  FIDUCIAL1X2  [FIDUCIAL-1X2]  76.2,170.43 0 top
FID90  FIDUCIAL1X2  [FIDUCIAL-1X2]  100.33,208.53 0 top
FID91  FIDUCIAL1X2  [FIDUCIAL-1X2]  76.2,170.43 0 bottom
FID92  FIDUCIAL1X2  [FIDUCIAL-1X2]  100.33,208.53 0 bottom
FID93  FIDUCIAL1X2  [FIDUCIAL-1X2]  109.22,170.43 0 top
FID94  FIDUCIAL1X2  [FIDUCIAL-1X2]  133.35,208.53 0 top
FID95  FIDUCIAL1X2  [FIDUCIAL-1X2]  109.22,170.43 0 bottom
FID96  FIDUCIAL1X2  [FIDUCIAL-1X2]  133.35,208.53 0 bottom
FID97  FIDUCIAL1X2  [FIDUCIAL-1X2]  155.96,122.17 0 top
FID98  FIDUCIAL1X2  [FIDUCIAL-1X2]  180.09,160.27 0 top
FID99  FIDUCIAL1X2  [FIDUCIAL-1X2]  155.96,122.17 0 bottom
FID100  FIDUCIAL1X2  [FIDUCIAL-1X2]  180.09,160.27 0 bottom
FID101  FIDUCIAL1X2  [FIDUCIAL-1X2]  188.98,122.17 0 top
FID102  FIDUCIAL1X2  [FIDUCIAL-1X2]  213.11,160.27 0 top
FID103  FIDUCIAL1X2  [FIDUCIAL-1X2]  188.98,122.17 0 bottom
FID104  FIDUCIAL1X2  [FIDUCIAL-1X2]  213.11,160.27 0 bottom
FID105  FIDUCIAL1X2  [FIDUCIAL-1X2]  222,122.17 0 top
FID106  FIDUCIAL1X2  [FIDUCIAL-1X2]  246.13,160.27 0 top
FID107  FIDUCIAL1X2  [FIDUCIAL-1X2]  222,122.17 0 bottom
FID108  FIDUCIAL1X2  [FIDUCIAL-1X2]  246.13,160.27 0 bottom
FID109  FIDUCIAL1X2  [FIDUCIAL-1X2]  255.02,122.17 0 top
FID110  FIDUCIAL1X2  [FIDUCIAL-1X2]  279.15,160.27 0 top
FID111  FIDUCIAL1X2  [FIDUCIAL-1X2]  255.02,122.17 0 bottom
FID112  FIDUCIAL1X2  [FIDUCIAL-1X2]  279.15,160.27 0 bottom
FID113  FIDUCIAL1X2  [FIDUCIAL-1X2]  155.96,170.43 0 top
FID114  FIDUCIAL1X2  [FIDUCIAL-1X2]  180.09,208.53 0 top
FID115  FIDUCIAL1X2  [FIDUCIAL-1X2]  155.96,170.43 0 bottom
FID116  FIDUCIAL1X2  [FIDUCIAL-1X2]  180.09,208.53 0 bottom
FID117  FIDUCIAL1X2  [FIDUCIAL-1X2]  188.98,170.43 0 top
FID118  FIDUCIAL1X2  [FIDUCIAL-1X2]  213.11,208.53 0 top
FID119  FIDUCIAL1X2  [FIDUCIAL-1X2]  188.98,170.43 0 bottom
FID120  FIDUCIAL1X2  [FIDUCIAL-1X2]  213.11,208.53 0 bottom
FID121  FIDUCIAL1X2  [FIDUCIAL-1X2]  222,170.43 0 top
FID122  FIDUCIAL1X2  [FIDUCIAL-1X2]  246.13,208.53 0 top
FID123  FIDUCIAL1X2  [FIDUCIAL-1X2]  222,170.43 0 bottom
FID124  FIDUCIAL1X2  [FIDUCIAL-1X2]  246.13,208.53 0 bottom
FID125  FIDUCIAL1X2  [FIDUCIAL-1X2]  255.02,170.43 0 top
FID126  FIDUCIAL1X2  [FIDUCIAL-1X2]  279.15,208.53 0 top
FID127  FIDUCIAL1X2  [FIDUCIAL-1X2]  255.02,170.43 0 bottom
FID128  FIDUCIAL1X2  [FIDUCIAL-1X2]  279.15,208.53 0 bottom
JP1  USB_MICROB  [USB-B-MICRO-SMD_V03]  24.13,49.28 270 top
JP2  USB_MICROB  [USB-B-MICRO-SMD_V03]  57.15,49.28 270 top
JP3  USB_MICROB  [USB-B-MICRO-SMD_V03]  90.17,49.28 270 top
JP4  USB_MICROB  [USB-B-MICRO-SMD_V03]  123.19,49.28 270 top
JP5  USB_MICROB  [USB-B-MICRO-SMD_V03]  24.13,97.54 270 top
JP6  USB_MICROB  [USB-B-MICRO-SMD_V03]  57.15,97.54 270 top
JP7  USB_MICROB  [USB-B-MICRO-SMD_V03]  90.17,97.54 270 top
JP8  USB_MICROB  [USB-B-MICRO-SMD_V03]  123.19,97.54 270 top
JP9  USB_MICROB  [USB-B-MICRO-SMD_V03]  169.93,49.28 270 top
JP10  USB_MICROB  [USB-B-MICRO-SMD_V03]  202.95,49.28 270 top
JP11  USB_MICROB  [USB-B-MICRO-SMD_V03]  235.97,49.28 270 top
JP12  USB_MICROB  [USB-B-MICRO-SMD_V03]  268.99,49.28 270 top
JP13  USB_MICROB  [USB-B-MICRO-SMD_V03]  169.93,97.54 270 top
JP14  USB_MICROB  [USB-B-MICRO-SMD_V03]  202.95,97.54 270 top
JP15  USB_MICROB  [USB-B-MICRO-SMD_V03]  235.97,97.54 270 top
JP16  USB_MICROB  [USB-B-MICRO-SMD_V03]  268.99,97.54 270 top
JP17  USB_MICROB  [USB-B-MICRO-SMD_V03]  24.13,159.51 270 top
JP18  USB_MICROB  [USB-B-MICRO-SMD_V03]  57.15,159.51 270 top
JP19  USB_MICROB  [USB-B-MICRO-SMD_V03]  90.17,159.51 270 top
JP20  USB_MICROB  [USB-B-MICRO-SMD_V03]  123.19,159.51 270 top
JP21  USB_MICROB  [USB-B-MICRO-SMD_V03]  24.13,207.77 270 top
JP22  USB_MICROB  [USB-B-MICRO-SMD_V03]  57.15,207.77 270 top
JP23  USB_MICROB  [USB-B-MICRO-SMD_V03]  90.17,207.77 270 top
JP24  USB_MICROB  [USB-B-MICRO-SMD_V03]  123.19,207.77 270 top
JP25  USB_MICROB  [USB-B-MICRO-SMD_V03]  169.93,159.51 270 top
JP26  USB_MICROB  [USB-B-MICRO-SMD_V03]  202.95,159.51 270 top
JP27  USB_MICROB  [USB-B-MICRO-SMD_V03]  235.97,159.51 270 top
JP28  USB_MICROB  [USB-B-MICRO-SMD_V03]  268.99,159.51 270 top
JP29  USB_MICROB  [USB-B-MICRO-SMD_V03]  169.93,207.77 270 top
JP30  USB_MICROB  [USB-B-MICRO-SMD_V03]  202.95,207.77 270 top
JP31  USB_MICROB  [USB-B-MICRO-SMD_V03]  235.97,207.77 270 top
JP32  USB_MICROB  [USB-B-MICRO-SMD_V03]  268.99,207.77 270 top
L1  1.0uH  [INDUCTOR-SRP4020]  23.88,25.65 0 top
L2  1.0uH  [INDUCTOR-SRP4020]  56.9,25.65 0 top
L3  1.0uH  [INDUCTOR-SRP4020]  89.92,25.65 0 top
L4  1.0uH  [INDUCTOR-SRP4020]  122.94,25.65 0 top
L5  1.0uH  [INDUCTOR-SRP4020]  23.88,73.91 0 top
L6  1.0uH  [INDUCTOR-SRP4020]  56.9,73.91 0 top
L7  1.0uH  [INDUCTOR-SRP4020]  89.92,73.91 0 top
L8  1.0uH  [INDUCTOR-SRP4020]  122.94,73.91 0 top
L9  1.0uH  [INDUCTOR-SRP4020]  169.67,25.65 0 top
L10  1.0uH  [INDUCTOR-SRP4020]  202.69,25.65 0 top
L11  1.0uH  [INDUCTOR-SRP4020]  235.71,25.65 0 top
L12  1.0uH  [INDUCTOR-SRP4020]  268.73,25.65 0 top
L13  1.0uH  [INDUCTOR-SRP4020]  169.67,73.91 0 top
L14  1.0uH  [INDUCTOR-SRP4020]  202.69,73.91 0 top
L15  1.0uH  [INDUCTOR-SRP4020]  235.71,73.91 0 top
L16  1.0uH  [INDUCTOR-SRP4020]  268.73,73.91 0 top
L17  1.0uH  [INDUCTOR-SRP4020]  23.88,135.89 0 top
L18  1.0uH  [INDUCTOR-SRP4020]  56.9,135.89 0 top
L19  1.0uH  [INDUCTOR-SRP4020]  89.92,135.89 0 top
L20  1.0uH  [INDUCTOR-SRP4020]  122.94,135.89 0 top
L21  1.0uH  [INDUCTOR-SRP4020]  23.88,184.15 0 top
L22  1.0uH  [INDUCTOR-SRP4020]  56.9,184.15 0 top
L23  1.0uH  [INDUCTOR-SRP4020]  89.92,184.15 0 top
L24  1.0uH  [INDUCTOR-SRP4020]  122.94,184.15 0 top
L25  1.0uH  [INDUCTOR-SRP4020]  169.67,135.89 0 top
L26  1.0uH  [INDUCTOR-SRP4020]  202.69,135.89 0 top
L27  1.0uH  [INDUCTOR-SRP4020]  235.71,135.89 0 top
L28  1.0uH  [INDUCTOR-SRP4020]  268.73,135.89 0 top
L29  1.0uH  [INDUCTOR-SRP4020]  169.67,184.15 0 top
L30  1.0uH  [INDUCTOR-SRP4020]  202.69,184.15 0 top
L31  1.0uH  [INDUCTOR-SRP4020]  235.71,184.15 0 top
L32  1.0uH  [INDUCTOR-SRP4020]  268.73,184.15 0 top
LOGO1  SFE_LOGO_NAME_FLAME.1_INCH  [SFE_LOGO_NAME_FLAME_.1]  18.16,7.11 0 top
LOGO2  OSHW-LOGOS  [OSHW-LOGO-S]  14.73,8.64 0 bottom
LOGO3  SFE_LOGO_NAME_FLAME.1_INCH  [SFE_LOGO_NAME_FLAME_.1]  29.97,7.11 0 bottom
LOGO4  OSHW-LOGOS  [OSHW-LOGO-S]  14.73,8.64 0 top
LOGO5  OSHW-LOGOS  [OSHW-LOGO-S]  47.75,8.64 0 bottom
LOGO6  SFE_LOGO_NAME_FLAME.1_INCH  [SFE_LOGO_NAME_FLAME_.1]  62.99,7.11 0 bottom
LOGO7  SFE_LOGO_NAME_FLAME.1_INCH  [SFE_LOGO_NAME_FLAME_.1]  51.18,7.11 0 top
LOGO8  OSHW-LOGOS  [OSHW-LOGO-S]  47.75,8.64 0 top
LOGO9  OSHW-LOGOS  [OSHW-LOGO-S]  80.77,8.64 0 bottom
LOGO10  SFE_LOGO_NAME_FLAME.1_INCH  [SFE_LOGO_NAME_FLAME_.1]  96.01,7.11 0 bottom
LOGO11  SFE_LOGO_NAME_FLAME.1_INCH  [SFE_LOGO_NAME_FLAME_.1]  84.2,7.11 0 top
LOGO12  OSHW-LOGOS  [OSHW-LOGO-S]  80.77,8.64 0 top
LOGO13  OSHW-LOGOS  [OSHW-LOGO-S]  113.79,8.64 0 bottom
LOGO14  SFE_LOGO_NAME_FLAME.1_INCH  [SFE_LOGO_NAME_FLAME_.1]  129.03,7.11 0 bottom
LOGO15  SFE_LOGO_NAME_FLAME.1_INCH  [SFE_LOGO_NAME_FLAME_.1]  117.22,7.11 0 top
LOGO16  OSHW-LOGOS  [OSHW-LOGO-S]  113.79,8.64 0 top
LOGO17  OSHW-LOGOS  [OSHW-LOGO-S]  14.73,56.9 0 bottom
LOGO18  SFE_LOGO_NAME_FLAME.1_INCH  [SFE_LOGO_NAME_FLAME_.1]  29.97,55.37 0 bottom
LOGO19  SFE_LOGO_NAME_FLAME.1_INCH  [SFE_LOGO_NAME_FLAME_.1]  18.16,55.37 0 top
LOGO20  OSHW-LOGOS  [OSHW-LOGO-S]  14.73,56.9 0 top
LOGO21  OSHW-LOGOS  [OSHW-LOGO-S]  47.75,56.9 0 bottom
LOGO22  SFE_LOGO_NAME_FLAME.1_INCH  [SFE_LOGO_NAME_FLAME_.1]  62.99,55.37 0 bottom
LOGO23  SFE_LOGO_NAME_FLAME.1_INCH  [SFE_LOGO_NAME_FLAME_.1]  51.18,55.37 0 top
LOGO24  OSHW-LOGOS  [OSHW-LOGO-S]  47.75,56.9 0 top
LOGO25  OSHW-LOGOS  [OSHW-LOGO-S]  80.77,56.9 0 bottom
LOGO26  SFE_LOGO_NAME_FLAME.1_INCH  [SFE_LOGO_NAME_FLAME_.1]  96.01,55.37 0 bottom
LOGO27  SFE_LOGO_NAME_FLAME.1_INCH  [SFE_LOGO_NAME_FLAME_.1]  84.2,55.37 0 top
LOGO28  OSHW-LOGOS  [OSHW-LOGO-S]  80.77,56.9 0 top
LOGO29  OSHW-LOGOS  [OSHW-LOGO-S]  113.79,56.9 0 bottom
LOGO30  SFE_LOGO_NAME_FLAME.1_INCH  [SFE_LOGO_NAME_FLAME_.1]  129.03,55.37 0 bottom
LOGO31  SFE_LOGO_NAME_FLAME.1_INCH  [SFE_LOGO_NAME_FLAME_.1]  117.22,55.37 0 top
LOGO32  OSHW-LOGOS  [OSHW-LOGO-S]  113.79,56.9 0 top
LOGO33  OSHW-LOGOS  [OSHW-LOGO-S]  160.53,8.64 0 bottom
LOGO34  SFE_LOGO_NAME_FLAME.1_INCH  [SFE_LOGO_NAME_FLAME_.1]  175.77,7.11 0 bottom
LOGO35  SFE_LOGO_NAME_FLAME.1_INCH  [SFE_LOGO_NAME_FLAME_.1]  163.96,7.11 0 top
LOGO36  OSHW-LOGOS  [OSHW-LOGO-S]  160.53,8.64 0 top
LOGO37  OSHW-LOGOS  [OSHW-LOGO-S]  193.55,8.64 0 bottom
LOGO38  SFE_LOGO_NAME_FLAME.1_INCH  [SFE_LOGO_NAME_FLAME_.1]  208.79,7.11 0 bottom
LOGO39  SFE_LOGO_NAME_FLAME.1_INCH  [SFE_LOGO_NAME_FLAME_.1]  196.98,7.11 0 top
LOGO40  OSHW-LOGOS  [OSHW-LOGO-S]  193.55,8.64 0 top
LOGO41  OSHW-LOGOS  [OSHW-LOGO-S]  226.57,8.64 0 bottom
LOGO42  SFE_LOGO_NAME_FLAME.1_INCH  [SFE_LOGO_NAME_FLAME_.1]  241.81,7.11 0 bottom
LOGO43  SFE_LOGO_NAME_FLAME.1_INCH  [SFE_LOGO_NAME_FLAME_.1]  230,7.11 0 top
LOGO44  OSHW-LOGOS  [OSHW-LOGO-S]  226.57,8.64 0 top
LOGO45  OSHW-LOGOS  [OSHW-LOGO-S]  259.59,8.64 0 bottom
LOGO46  SFE_LOGO_NAME_FLAME.1_INCH  [SFE_LOGO_NAME_FLAME_.1]  274.83,7.11 0 bottom
LOGO47  SFE_LOGO_NAME_FLAME.1_INCH  [SFE_LOGO_NAME_FLAME_.1]  263.02,7.11 0 top
LOGO48  OSHW-LOGOS  [OSHW-LOGO-S]  259.59,8.64 0 top
LOGO49  OSHW-LOGOS  [OSHW-LOGO-S]  160.53,56.9 0 bottom
LOGO50  SFE_LOGO_NAME_FLAME.1_INCH  [SFE_LOGO_NAME_FLAME_.1]  175.77,55.37 0 bottom
LOGO51  SFE_LOGO_NAME_FLAME.1_INCH  [SFE_LOGO_NAME_FLAME_.1]  163.96,55.37 0 top
LOGO52  OSHW-LOGOS  [OSHW-LOGO-S]  160.53,56.9 0 top
LOGO53  OSHW-LOGOS  [OSHW-LOGO-S]  193.55,56.9 0 bottom
LOGO54  SFE_LOGO_NAME_FLAME.1_INCH  [SFE_LOGO_NAME_FLAME_.1]  208.79,55.37 0 bottom
LOGO55  SFE_LOGO_NAME_FLAME.1_INCH  [SFE_LOGO_NAME_FLAME_.1]  196.98,55.37 0 top
LOGO56  OSHW-LOGOS  [OSHW-LOGO-S]  193.55,56.9 0 top
LOGO57  OSHW-LOGOS  [OSHW-LOGO-S]  226.57,56.9 0 bottom
LOGO58  SFE_LOGO_NAME_FLAME.1_INCH  [SFE_LOGO_NAME_FLAME_.1]  241.81,55.37 0 bottom
LOGO59  SFE_LOGO_NAME_FLAME.1_INCH  [SFE_LOGO_NAME_FLAME_.1]  230,55.37 0 top
LOGO60  OSHW-LOGOS  [OSHW-LOGO-S]  226.57,56.9 0 top
LOGO61  OSHW-LOGOS  [OSHW-LOGO-S]  259.59,56.9 0 bottom
LOGO62  SFE_LOGO_NAME_FLAME.1_INCH  [SFE_LOGO_NAME_FLAME_.1]  274.83,55.37 0 bottom
LOGO63  SFE_LOGO_NAME_FLAME.1_INCH  [SFE_LOGO_NAME_FLAME_.1]  263.02,55.37 0 top
LOGO64  OSHW-LOGOS  [OSHW-LOGO-S]  259.59,56.9 0 top
LOGO65  OSHW-LOGOS  [OSHW-LOGO-S]  14.73,118.87 0 bottom
LOGO66  SFE_LOGO_NAME_FLAME.1_INCH  [SFE_LOGO_NAME_FLAME_.1]  29.97,117.35 0 bottom
LOGO67  SFE_LOGO_NAME_FLAME.1_INCH  [SFE_LOGO_NAME_FLAME_.1]  18.16,117.35 0 top
LOGO68  OSHW-LOGOS  [OSHW-LOGO-S]  14.73,118.87 0 top
LOGO69  OSHW-LOGOS  [OSHW-LOGO-S]  47.75,118.87 0 bottom
LOGO70  SFE_LOGO_NAME_FLAME.1_INCH  [SFE_LOGO_NAME_FLAME_.1]  62.99,117.35 0 bottom
LOGO71  SFE_LOGO_NAME_FLAME.1_INCH  [SFE_LOGO_NAME_FLAME_.1]  51.18,117.35 0 top
LOGO72  OSHW-LOGOS  [OSHW-LOGO-S]  47.75,118.87 0 top
LOGO73  OSHW-LOGOS  [OSHW-LOGO-S]  80.77,118.87 0 bottom
LOGO74  SFE_LOGO_NAME_FLAME.1_INCH  [SFE_LOGO_NAME_FLAME_.1]  96.01,117.35 0 bottom
LOGO75  SFE_LOGO_NAME_FLAME.1_INCH  [SFE_LOGO_NAME_FLAME_.1]  84.2,117.35 0 top
LOGO76  OSHW-LOGOS  [OSHW-LOGO-S]  80.77,118.87 0 top
LOGO77  OSHW-LOGOS  [OSHW-LOGO-S]  113.79,118.87 0 bottom
LOGO78  SFE_LOGO_NAME_FLAME.1_INCH  [SFE_LOGO_NAME_FLAME_.1]  129.03,117.35 0 bottom
LOGO79  SFE_LOGO_NAME_FLAME.1_INCH  [SFE_LOGO_NAME_FLAME_.1]  117.22,117.35 0 top
LOGO80  OSHW-LOGOS  [OSHW-LOGO-S]  113.79,118.87 0 top
LOGO81  OSHW-LOGOS  [OSHW-LOGO-S]  14.73,167.13 0 bottom
LOGO82  SFE_LOGO_NAME_FLAME.1_INCH  [SFE_LOGO_NAME_FLAME_.1]  29.97,165.61 0 bottom
LOGO83  SFE_LOGO_NAME_FLAME.1_INCH  [SFE_LOGO_NAME_FLAME_.1]  18.16,165.61 0 top
LOGO84  OSHW-LOGOS  [OSHW-LOGO-S]  14.73,167.13 0 top
LOGO85  OSHW-LOGOS  [OSHW-LOGO-S]  47.75,167.13 0 bottom
LOGO86  SFE_LOGO_NAME_FLAME.1_INCH  [SFE_LOGO_NAME_FLAME_.1]  62.99,165.61 0 bottom
LOGO87  SFE_LOGO_NAME_FLAME.1_INCH  [SFE_LOGO_NAME_FLAME_.1]  51.18,165.61 0 top
LOGO88  OSHW-LOGOS  [OSHW-LOGO-S]  47.75,167.13 0 top
LOGO89  OSHW-LOGOS  [OSHW-LOGO-S]  80.77,167.13 0 bottom
LOGO90  SFE_LOGO_NAME_FLAME.1_INCH  [SFE_LOGO_NAME_FLAME_.1]  96.01,165.61 0 bottom
LOGO91  SFE_LOGO_NAME_FLAME.1_INCH  [SFE_LOGO_NAME_FLAME_.1]  84.2,165.61 0 top
LOGO92  OSHW-LOGOS  [OSHW-LOGO-S]  80.77,167.13 0 top
LOGO93  OSHW-LOGOS  [OSHW-LOGO-S]  113.79,167.13 0 bottom
LOGO94  SFE_LOGO_NAME_FLAME.1_INCH  [SFE_LOGO_NAME_FLAME_.1]  129.03,165.61 0 bottom
LOGO95  SFE_LOGO_NAME_FLAME.1_INCH  [SFE_LOGO_NAME_FLAME_.1]  117.22,165.61 0 top
LOGO96  OSHW-LOGOS  [OSHW-LOGO-S]  113.79,167.13 0 top
LOGO97  OSHW-LOGOS  [OSHW-LOGO-S]  160.53,118.87 0 bottom
LOGO98  SFE_LOGO_NAME_FLAME.1_INCH  [SFE_LOGO_NAME_FLAME_.1]  175.77,117.35 0 bottom
LOGO99  SFE_LOGO_NAME_FLAME.1_INCH  [SFE_LOGO_NAME_FLAME_.1]  163.96,117.35 0 top
LOGO100  OSHW-LOGOS  [OSHW-LOGO-S]  160.53,118.87 0 top
LOGO101  OSHW-LOGOS  [OSHW-LOGO-S]  193.55,118.87 0 bottom
LOGO102  SFE_LOGO_NAME_FLAME.1_INCH  [SFE_LOGO_NAME_FLAME_.1]  208.79,117.35 0 bottom
LOGO103  SFE_LOGO_NAME_FLAME.1_INCH  [SFE_LOGO_NAME_FLAME_.1]  196.98,117.35 0 top
LOGO104  OSHW-LOGOS  [OSHW-LOGO-S]  193.55,118.87 0 top
LOGO105  OSHW-LOGOS  [OSHW-LOGO-S]  226.57,118.87 0 bottom
LOGO106  SFE_LOGO_NAME_FLAME.1_INCH  [SFE_LOGO_NAME_FLAME_.1]  241.81,117.35 0 bottom
LOGO107  SFE_LOGO_NAME_FLAME.1_INCH  [SFE_LOGO_NAME_FLAME_.1]  230,117.35 0 top
LOGO108  OSHW-LOGOS  [OSHW-LOGO-S]  226.57,118.87 0 top
LOGO109  OSHW-LOGOS  [OSHW-LOGO-S]  259.59,118.87 0 bottom
LOGO110  SFE_LOGO_NAME_FLAME.1_INCH  [SFE_LOGO_NAME_FLAME_.1]  274.83,117.35 0 bottom
LOGO111  SFE_LOGO_NAME_FLAME.1_INCH  [SFE_LOGO_NAME_FLAME_.1]  263.02,117.35 0 top
LOGO112  OSHW-LOGOS  [OSHW-LOGO-S]  259.59,118.87 0 top
LOGO113  OSHW-LOGOS  [OSHW-LOGO-S]  160.53,167.13 0 bottom
LOGO114  SFE_LOGO_NAME_FLAME.1_INCH  [SFE_LOGO_NAME_FLAME_.1]  175.77,165.61 0 bottom
LOGO115  SFE_LOGO_NAME_FLAME.1_INCH  [SFE_LOGO_NAME_FLAME_.1]  163.96,165.61 0 top
LOGO116  OSHW-LOGOS  [OSHW-LOGO-S]  160.53,167.13 0 top
LOGO117  OSHW-LOGOS  [OSHW-LOGO-S]  193.55,167.13 0 bottom
LOGO118  SFE_LOGO_NAME_FLAME.1_INCH  [SFE_LOGO_NAME_FLAME_.1]  208.79,165.61 0 bottom
LOGO119  SFE_LOGO_NAME_FLAME.1_INCH  [SFE_LOGO_NAME_FLAME_.1]  196.98,165.61 0 top
LOGO120  OSHW-LOGOS  [OSHW-LOGO-S]  193.55,167.13 0 top
LOGO121  OSHW-LOGOS  [OSHW-LOGO-S]  226.57,167.13 0 bottom
LOGO122  SFE_LOGO_NAME_FLAME.1_INCH  [SFE_LOGO_NAME_FLAME_.1]  241.81,165.61 0 bottom
LOGO123  SFE_LOGO_NAME_FLAME.1_INCH  [SFE_LOGO_NAME_FLAME_.1]  230,165.61 0 top
LOGO124  OSHW-LOGOS  [OSHW-LOGO-S]  226.57,167.13 0 top
LOGO125  OSHW-LOGOS  [OSHW-LOGO-S]  259.59,167.13 0 bottom
LOGO126  SFE_LOGO_NAME_FLAME.1_INCH  [SFE_LOGO_NAME_FLAME_.1]  274.83,165.61 0 bottom
LOGO127  SFE_LOGO_NAME_FLAME.1_INCH  [SFE_LOGO_NAME_FLAME_.1]  263.02,165.61 0 top
LOGO128  OSHW-LOGOS  [OSHW-LOGO-S]  259.59,167.13 0 top
Q1  BSS138  [SOT23-3]  20.78,30 0 top
Q2  BSS138  [SOT23-3]  53.8,30 0 top
Q3  BSS138  [SOT23-3]  86.82,30 0 top
Q4  BSS138  [SOT23-3]  119.84,30 0 top
Q5  BSS138  [SOT23-3]  20.78,78.26 0 top
Q6  BSS138  [SOT23-3]  53.8,78.26 0 top
Q7  BSS138  [SOT23-3]  86.82,78.26 0 top
Q8  BSS138  [SOT23-3]  119.84,78.26 0 top
Q9  BSS138  [SOT23-3]  166.57,30 0 top
Q10  BSS138  [SOT23-3]  199.59,30 0 top
Q11  BSS138  [SOT23-3]  232.61,30 0 top
Q12  BSS138  [SOT23-3]  265.63,30 0 top
Q13  BSS138  [SOT23-3]  166.57,78.26 0 top
Q14  BSS138  [SOT23-3]  199.59,78.26 0 top
Q15  BSS138  [SOT23-3]  232.61,78.26 0 top
Q16  BSS138  [SOT23-3]  265.63,78.26 0 top
Q17  BSS138  [SOT23-3]  20.78,140.23 0 top
Q18  BSS138  [SOT23-3]  53.8,140.23 0 top
Q19  BSS138  [SOT23-3]  86.82,140.23 0 top
Q20  BSS138  [SOT23-3]  119.84,140.23 0 top
Q21  BSS138  [SOT23-3]  20.78,188.49 0 top
Q22  BSS138  [SOT23-3]  53.8,188.49 0 top
Q23  BSS138  [SOT23-3]  86.82,188.49 0 top
Q24  BSS138  [SOT23-3]  119.84,188.49 0 top
Q25  BSS138  [SOT23-3]  166.57,140.23 0 top
Q26  BSS138  [SOT23-3]  199.59,140.23 0 top
Q27  BSS138  [SOT23-3]  232.61,140.23 0 top
Q28  BSS138  [SOT23-3]  265.63,140.23 0 top
Q29  BSS138  [SOT23-3]  166.57,188.49 0 top
Q30  BSS138  [SOT23-3]  199.59,188.49 0 top
Q31  BSS138  [SOT23-3]  232.61,188.49 0 top
Q32  BSS138  [SOT23-3]  265.63,188.49 0 top
R1  27  [0603]  24.89,43.69 270 top
R2  27  [0603]  23.37,43.69 270 top
R3  1K  [0603-RES]  11.43,33.15 270 top
R4  1K  [0603-RES]  11.43,38.1 270 top
R5  1K  [0603-RES]  11.43,45.34 270 top
R6  100  [0603-RES]  24.38,31.5 0 top
R7  100  [0603-RES]  28.45,34.04 270 top
R8  10K  [0603-RES]  13.46,28.7 270 top
R9  22  [0603-RES]  13.46,25.4 90 top
R10  1K  [0603-RES]  19.3,26.67 270 top
R11  27  [0603]  57.91,43.69 270 top
R12  27  [0603]  56.39,43.69 270 top
R13  680k  [0603-RES]  25.91,21.84 90 top
R14  120k  [0603-RES]  25.91,18.54 90 top
R15  1K  [0603-RES]  44.45,33.15 270 top
R16  1K  [0603-RES]  44.45,38.1 270 top
R17  1K  [0603-RES]  44.45,45.34 270 top
R18  100  [0603-RES]  57.4,31.5 0 top
R19  100  [0603-RES]  61.47,34.04 270 top
R20  10K  [0603-RES]  46.48,28.7 270 top
R21  22  [0603-RES]  46.48,25.4 90 top
R22  680k  [0603-RES]  58.93,21.84 90 top
R23  120k  [0603-RES]  58.93,18.54 90 top
R24  1K  [0603-RES]  52.32,26.67 270 top
R25  27  [0603]  90.93,43.69 270 top
R26  27  [0603]  89.41,43.69 270 top
R27  1K  [0603-RES]  77.47,33.15 270 top
R28  1K  [0603-RES]  77.47,38.1 270 top
R29  1K  [0603-RES]  77.47,45.34 270 top
R30  100  [0603-RES]  90.42,31.5 0 top
R31  100  [0603-RES]  94.49,34.04 270 top
R32  10K  [0603-RES]  79.5,28.7 270 top
R33  22  [0603-RES]  79.5,25.4 90 top
R34  680k  [0603-RES]  91.95,21.84 90 top
R35  120k  [0603-RES]  91.95,18.54 90 top
R36  1K  [0603-RES]  85.34,26.67 270 top
R37  27  [0603]  123.95,43.69 270 top
R38  27  [0603]  122.43,43.69 270 top
R39  1K  [0603-RES]  110.49,33.15 270 top
R40  1K  [0603-RES]  110.49,38.1 270 top
R41  1K  [0603-RES]  110.49,45.34 270 top
R42  100  [0603-RES]  123.44,31.5 0 top
R43  100  [0603-RES]  127.51,34.04 270 top
R44  10K  [0603-RES]  112.52,28.7 270 top
R45  22  [0603-RES]  112.52,25.4 90 top
R46  680k  [0603-RES]  124.97,21.84 90 top
R47  120k  [0603-RES]  124.97,18.54 90 top
R48  1K  [0603-RES]  118.36,26.67 270 top
R49  27  [0603]  24.89,91.95 270 top
R50  27  [0603]  23.37,91.95 270 top
R51  1K  [0603-RES]  11.43,81.41 270 top
R52  1K  [0603-RES]  11.43,86.36 270 top
R53  1K  [0603-RES]  11.43,93.6 270 top
R54  100  [0603-RES]  24.38,79.76 0 top
R55  100  [0603-RES]  28.45,82.3 270 top
R56  10K  [0603-RES]  13.46,76.96 270 top
R57  22  [0603-RES]  13.46,73.66 90 top
R58  680k  [0603-RES]  25.91,70.1 90 top
R59  120k  [0603-RES]  25.91,66.8 90 top
R60  1K  [0603-RES]  19.3,74.93 270 top
R61  27  [0603]  57.91,91.95 270 top
R62  27  [0603]  56.39,91.95 270 top
R63  1K  [0603-RES]  44.45,81.41 270 top
R64  1K  [0603-RES]  44.45,86.36 270 top
R65  1K  [0603-RES]  44.45,93.6 270 top
R66  100  [0603-RES]  57.4,79.76 0 top
R67  100  [0603-RES]  61.47,82.3 270 top
R68  10K  [0603-RES]  46.48,76.96 270 top
R69  22  [0603-RES]  46.48,73.66 90 top
R70  680k  [0603-RES]  58.93,70.1 90 top
R71  120k  [0603-RES]  58.93,66.8 90 top
R72  1K  [0603-RES]  52.32,74.93 270 top
R73  27  [0603]  90.93,91.95 270 top
R74  27  [0603]  89.41,91.95 270 top
R75  1K  [0603-RES]  77.47,81.41 270 top
R76  1K  [0603-RES]  77.47,86.36 270 top
R77  1K  [0603-RES]  77.47,93.6 270 top
R78  100  [0603-RES]  90.42,79.76 0 top
R79  100  [0603-RES]  94.49,82.3 270 top
R80  10K  [0603-RES]  79.5,76.96 270 top
R81  22  [0603-RES]  79.5,73.66 90 top
R82  680k  [0603-RES]  91.95,70.1 90 top
R83  120k  [0603-RES]  91.95,66.8 90 top
R84  1K  [0603-RES]  85.34,74.93 270 top
R85  27  [0603]  123.95,91.95 270 top
R86  27  [0603]  122.43,91.95 270 top
R87  1K  [0603-RES]  110.49,81.41 270 top
R88  1K  [0603-RES]  110.49,86.36 270 top
R89  1K  [0603-RES]  110.49,93.6 270 top
R90  100  [0603-RES]  123.44,79.76 0 top
R91  100  [0603-RES]  127.51,82.3 270 top
R92  10K  [0603-RES]  112.52,76.96 270 top
R93  22  [0603-RES]  112.52,73.66 90 top
R94  680k  [0603-RES]  124.97,70.1 90 top
R95  120k  [0603-RES]  124.97,66.8 90 top
R96  1K  [0603-RES]  118.36,74.93 270 top
R97  27  [0603]  170.69,43.69 270 top
R98  27  [0603]  169.16,43.69 270 top
R99  1K  [0603-RES]  157.23,33.15 270 top
R100  1K  [0603-RES]  157.23,38.1 270 top
R101  1K  [0603-RES]  157.23,45.34 270 top
R102  100  [0603-RES]  170.18,31.5 0 top
R103  100  [0603-RES]  174.24,34.04 270 top
R104  10K  [0603-RES]  159.26,28.7 270 top
R105  22  [0603-RES]  159.26,25.4 90 top
R106  680k  [0603-RES]  171.7,21.84 90 top
R107  120k  [0603-RES]  171.7,18.54 90 top
R108  1K  [0603-RES]  165.1,26.67 270 top
R109  27  [0603]  203.71,43.69 270 top
R110  27  [0603]  202.18,43.69 270 top
R111  1K  [0603-RES]  190.25,33.15 270 top